# EAGLE board SparkFun_XBee_Regulated_Qwiic-Panel (EAGLE 9.6.2), part 1 of 3
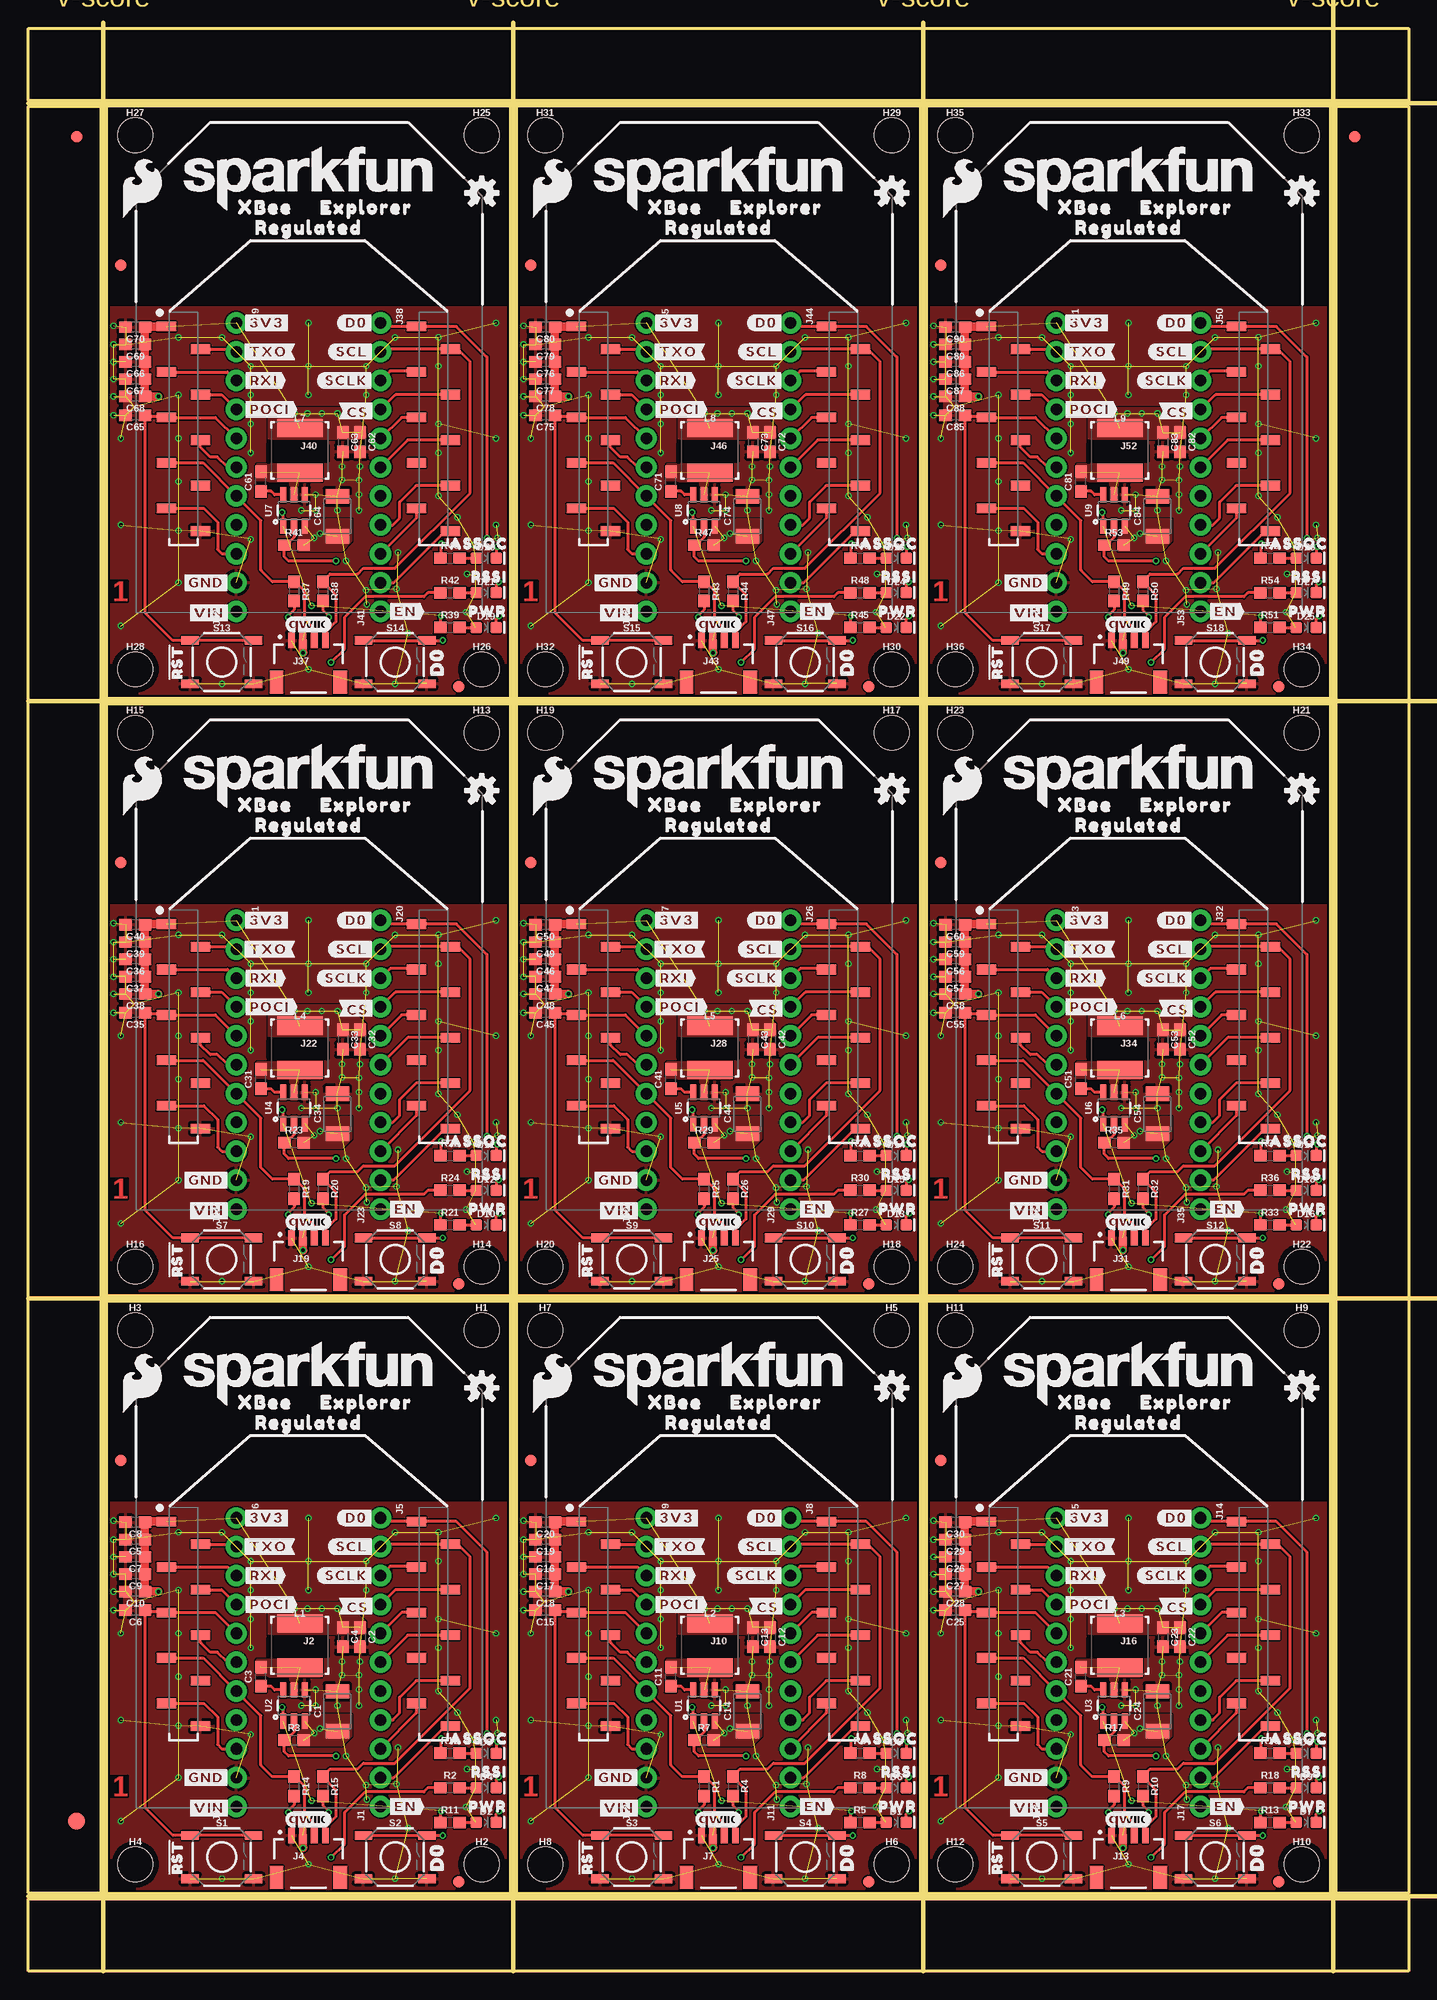
[diagram p0: board, top side]
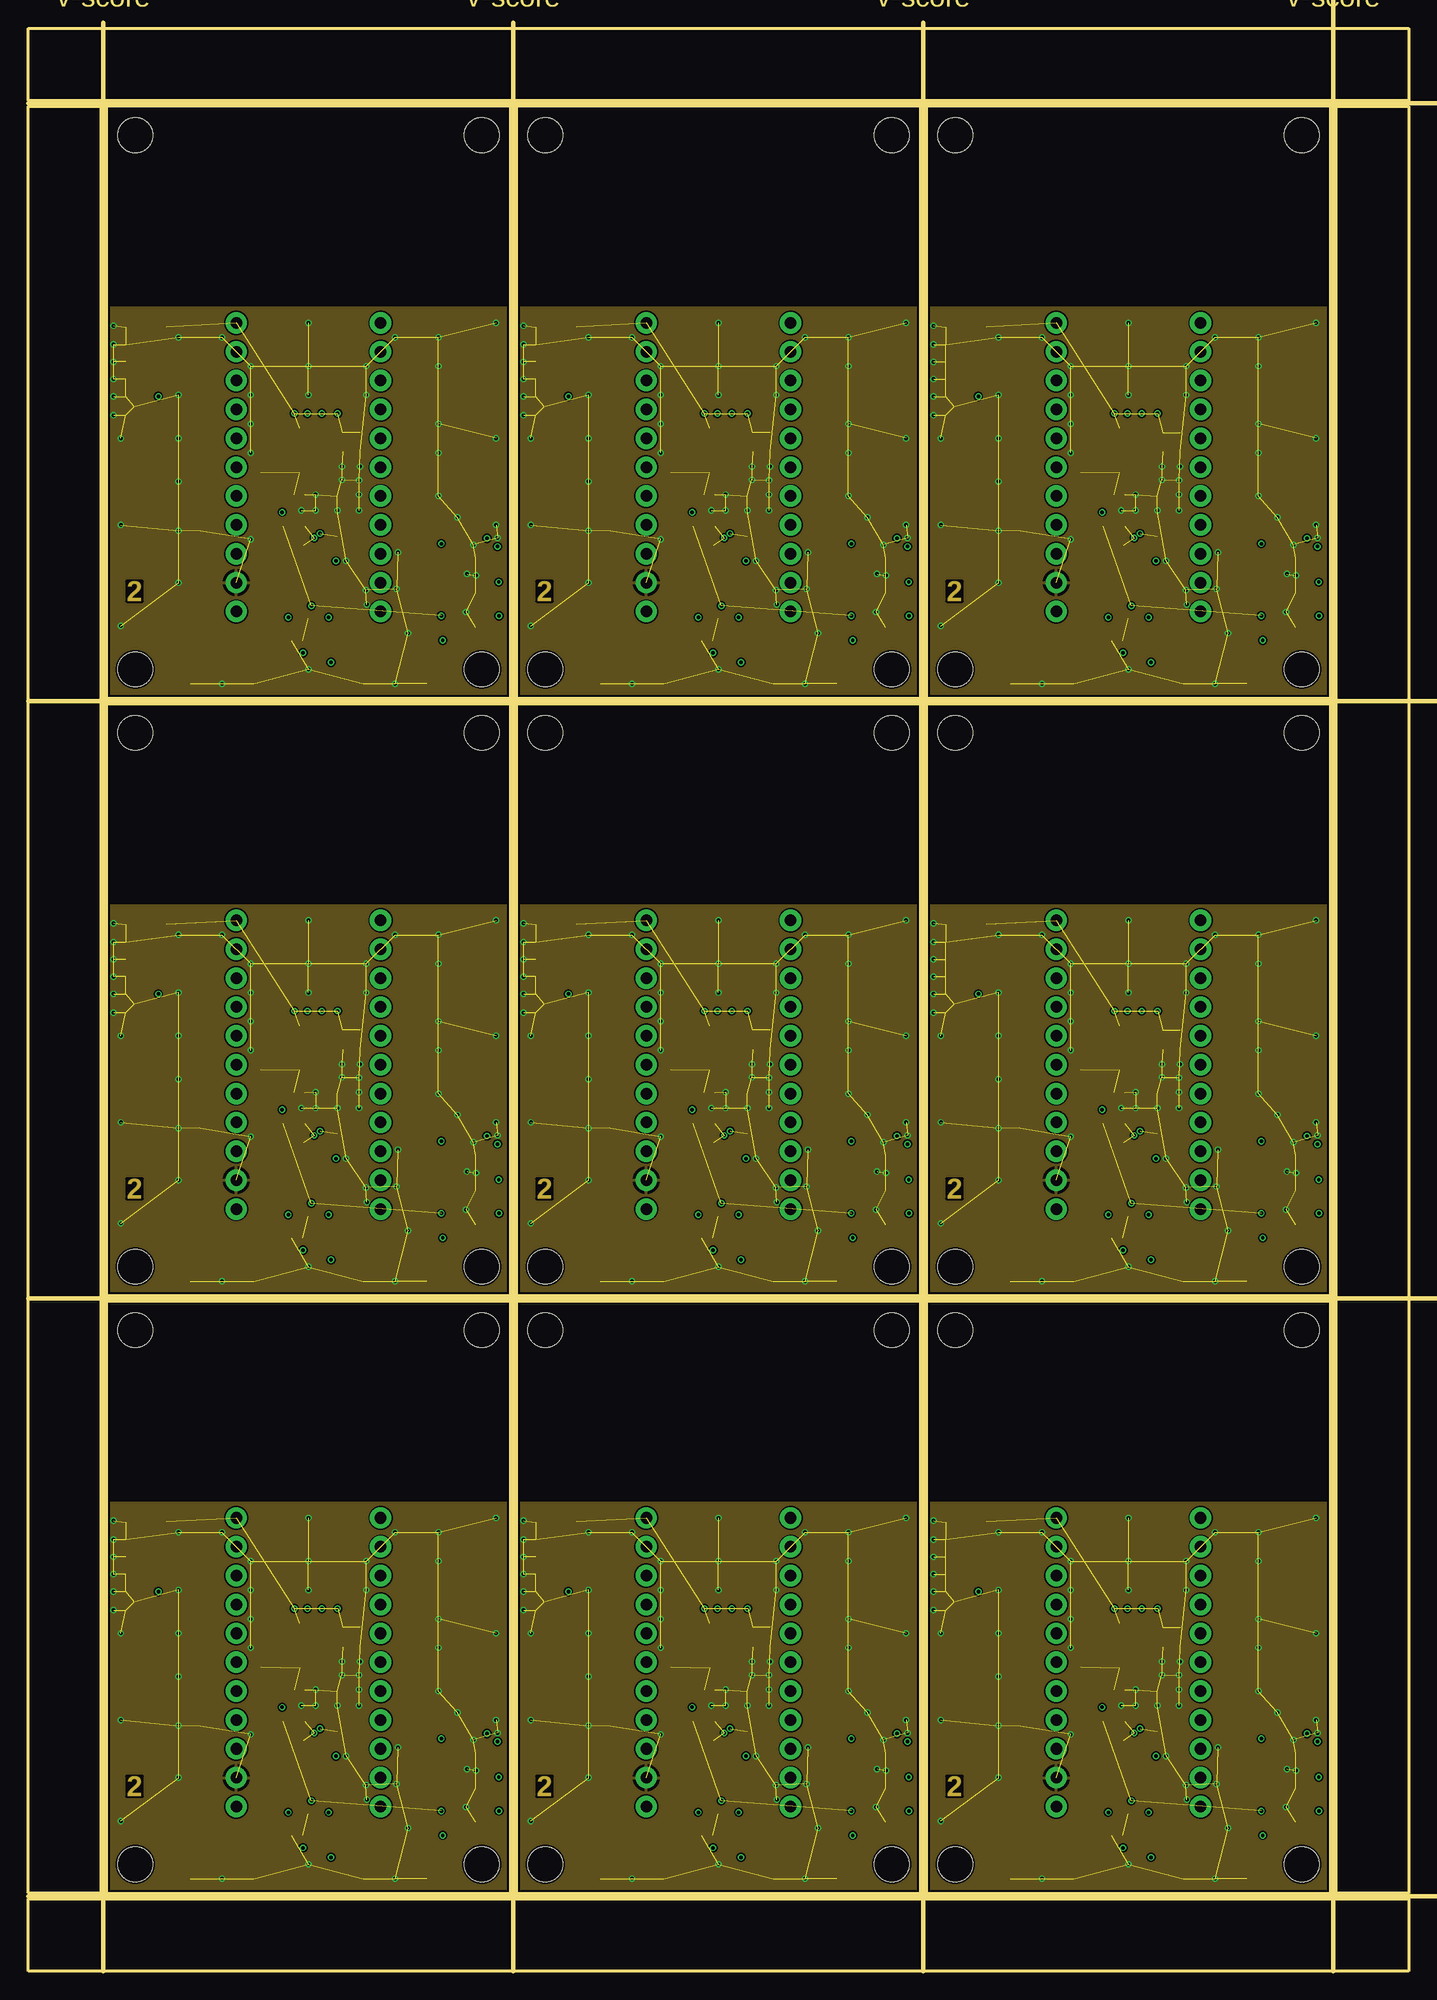
[diagram p1: board, inner layer Route2]
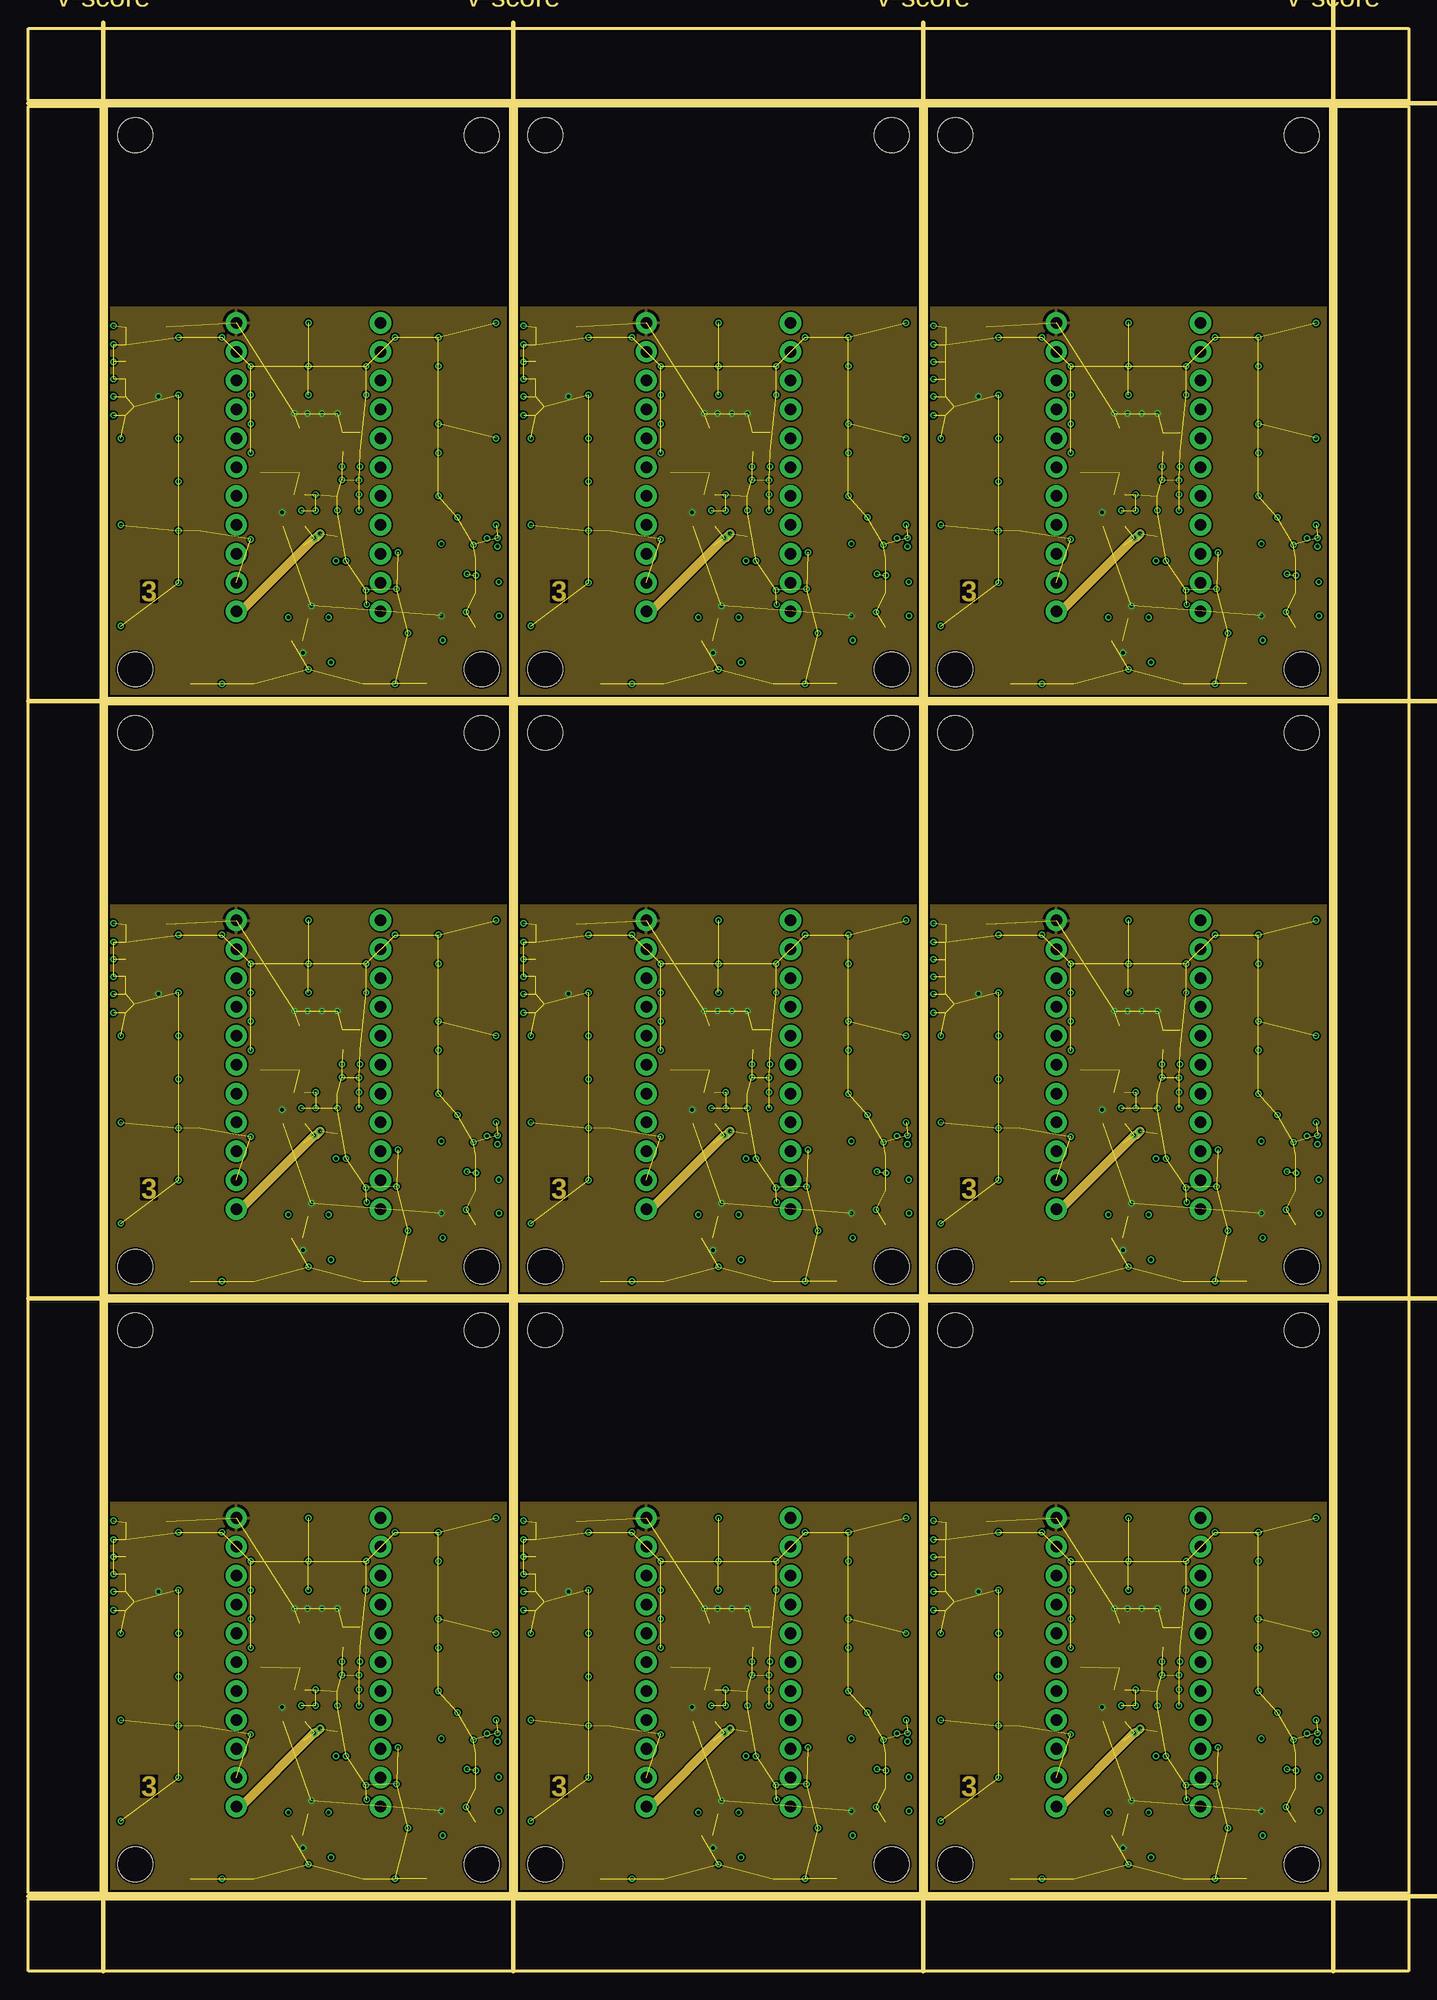
[diagram p2: board, inner layer Route15]
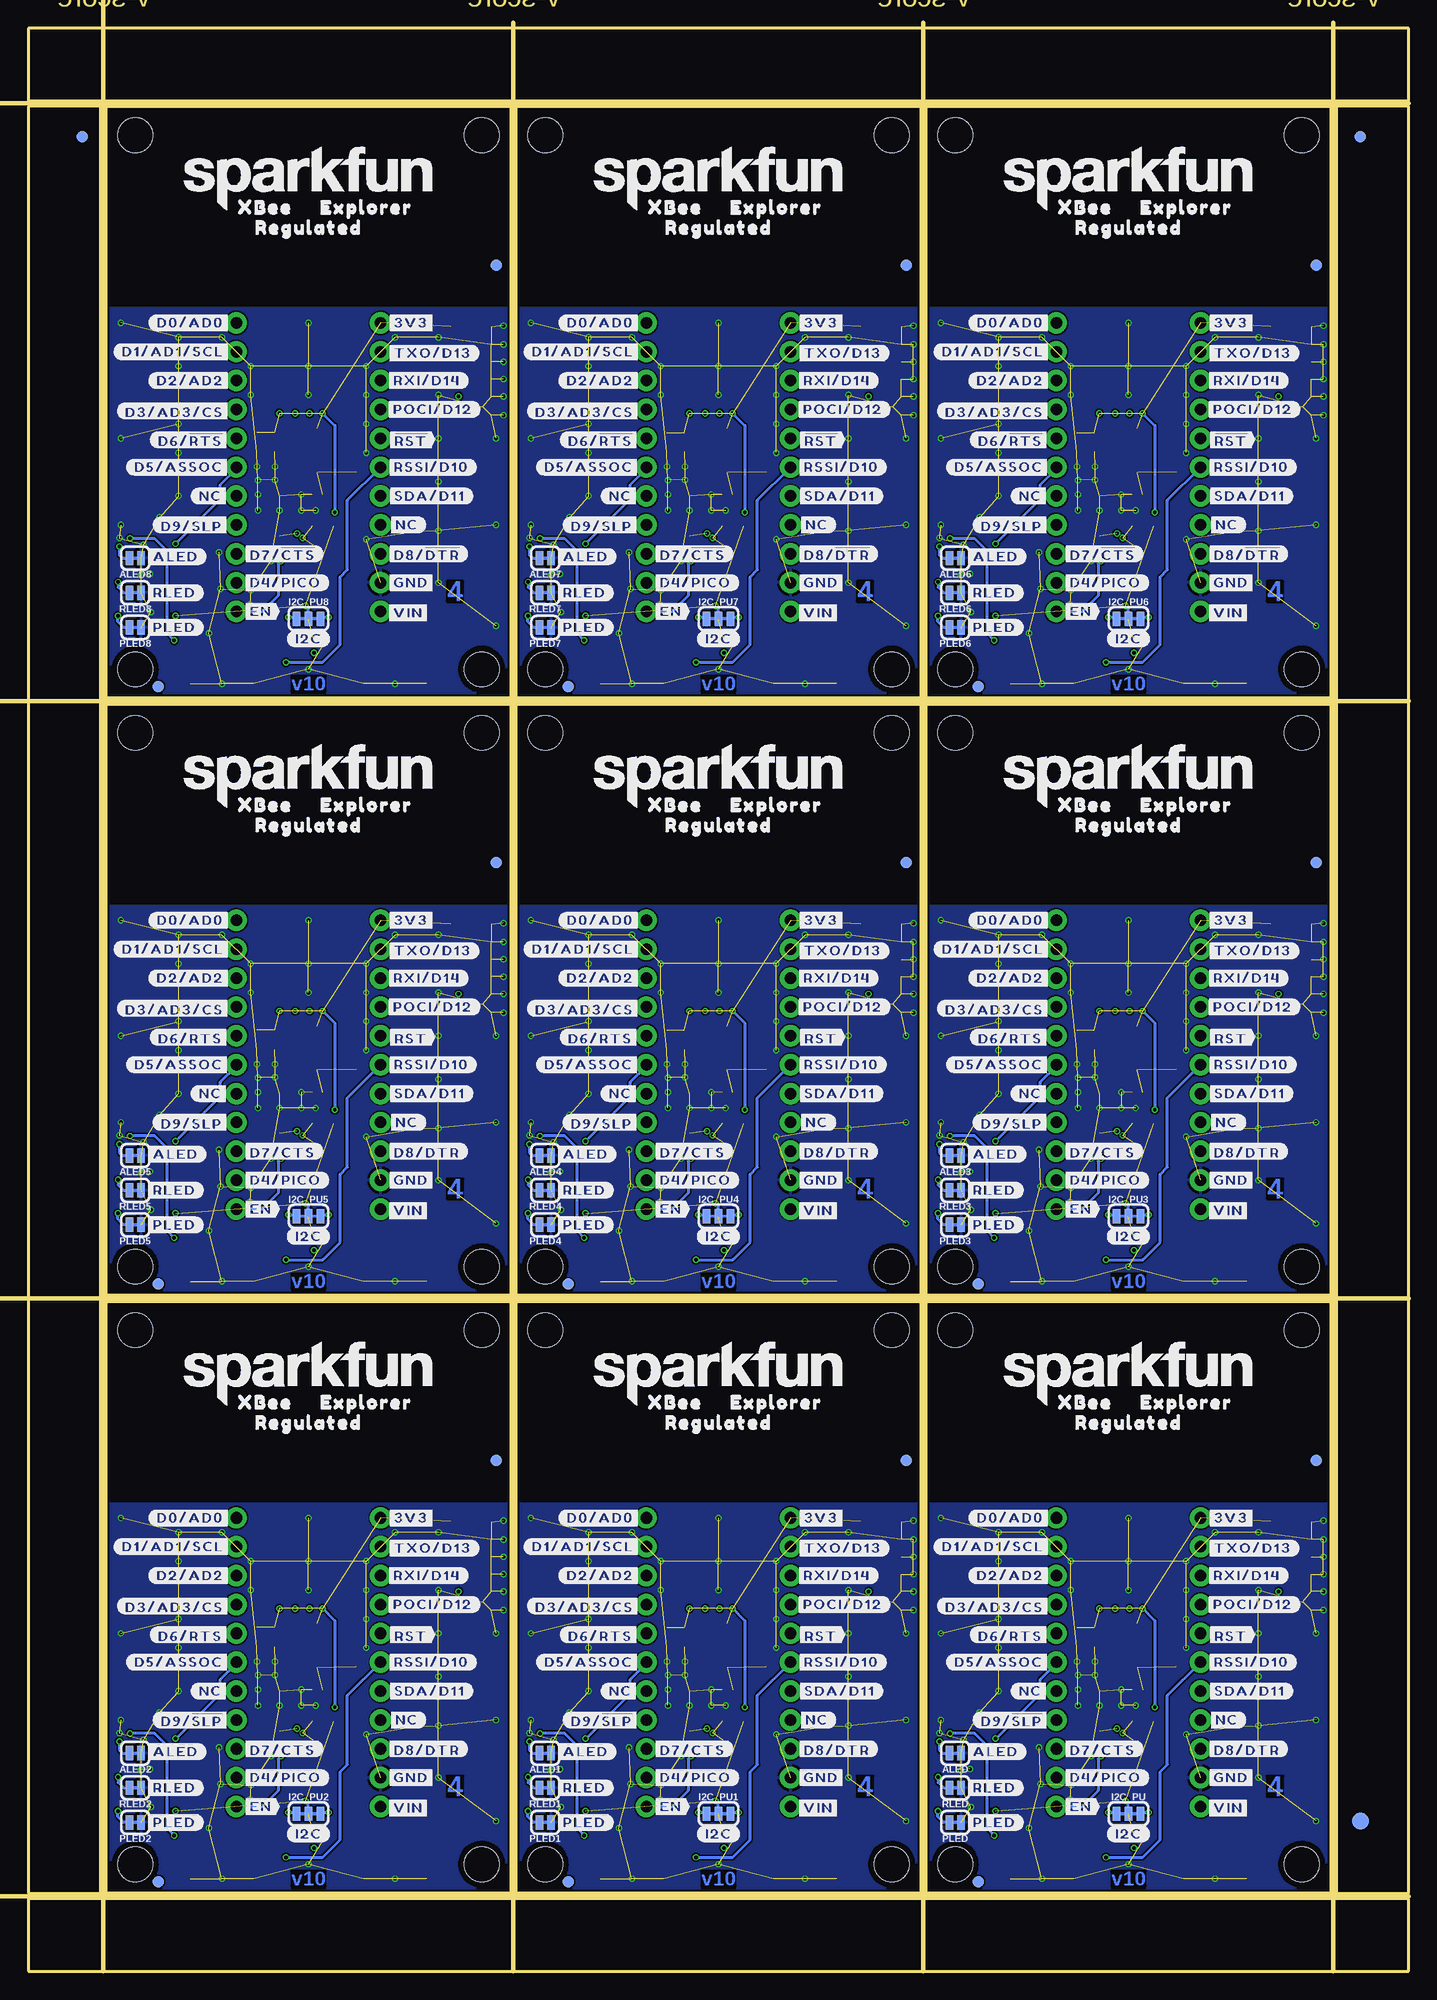
[diagram p3: board, bottom side, seen from below]

Size 121.41 x 170.94 mm. Coordinates in mm from the lower left corner, seen from the top.
Outline: 6.86,58.93 6.86,6.86 42.42,6.86 42.42,58.93 6.86,58.93
Outline: 42.93,58.93 42.93,6.86 78.49,6.86 78.49,58.93 42.93,58.93
Outline: 78.99,58.93 78.99,6.86 114.55,6.86 114.55,58.93 78.99,58.93
Outline: 6.86,111.51 6.86,59.44 42.42,59.44 42.42,111.51 6.86,111.51
Outline: 42.93,111.51 42.93,59.44 78.49,59.44 78.49,111.51 42.93,111.51
Outline: 78.99,111.51 78.99,59.44 114.55,59.44 114.55,111.51 78.99,111.51
Outline: 6.86,164.08 6.86,112.01 42.42,112.01 42.42,164.08 6.86,164.08
Outline: 42.93,164.08 42.93,112.01 78.49,112.01 78.49,164.08 42.93,164.08
Outline: 78.99,164.08 78.99,112.01 114.55,112.01 114.55,164.08 78.99,164.08
Outline: 0,6.35 121.41,6.35 121.41,0 0,0 0,6.35
Outline: 115.06,164.08 121.41,164.08 121.41,6.86 115.06,6.86 115.06,164.08
Outline: 0,170.94 121.41,170.94 121.41,164.59 0,164.59 0,170.94
Outline: 0,164.08 6.35,164.08 6.35,6.86 0,6.86 0,164.08
Copper layers (1*2*15*16): Top 0.035559375mm / dielectric 0.47751875mm / Route2 0.035559375mm / dielectric 0.47751875mm / Route15 0.035559375mm / dielectric 0.47751875mm / Bottom 0.035559375mm
Design rules "SparkFun_XBee_Regulated_Qwiic": minimum track width 5mil, minimum drill 0.2mm, track to track 5mil, track to pad 5mil, pad to pad 5mil, via to via 5mil, smd to smd 5mil, copper to edge 7mil, drill to drill 7mil, minimum pad ring 5mil, minimum via ring 5mil, stop-mask expansion 2.5mil, vias tented up to drill 25mil, thermal gap 10mil
tRestrict: area 21,27.8 to 21.2,29.3; area 26.2,27.7 to 26.4,29.2; area 57.1,27.8 to 57.3,29.3; area 62.3,27.7 to 62.5,29.2; area 93.2,27.8 to 93.3,29.3; area 98.4,27.7 to 98.6,29.2; area 21,80.4 to 21.2,81.9; area 26.2,80.3 to 26.4,81.7; area 57.1,80.4 to 57.3,81.9; area 62.3,80.3 to 62.5,81.7; area 93.2,80.4 to 93.3,81.9; area 98.4,80.3 to 98.6,81.7; area 21,133 to 21.2,134.4; area 26.2,132.8 to 26.4,134.3; area 57.1,133 to 57.3,134.4; area 62.3,132.8 to 62.5,134.3; area 93.2,133 to 93.3,134.4; area 98.4,132.8 to 98.6,134.3
Milling: 8 lines

## Footprints (pad centres in the part's own frame; a part is rotated, then mirrored left to right if it is on the bottom)
SMT-JUMPER_2_NC_TRACE_SILK = smd 0.66 x 1.27: 1 -0.521,0; 2 0.521,0
1210 = smd 1.27 x 2.06: 1 -1.755,0; 2 1.755,0
0603 = smd 1.1 x 1: 1 -0.85,0; 2 0.85,0
LED-0603 = smd 1 x 1: A -0.877,0; C 0.877,0
FIDUCIAL-1X2 = smd 1 x 1: 1 0,0
FIDUCIAL-1.5X3 = smd 1.5 x 1.5: 1 0,0
STAND-OFF-TIGHT = hole 3.048: 0,0
SMT-JUMPER_3_2-NC_TRACE_SILK = smd 0.66 x 1.27: 1 -1.041,0; 2 0,0; 3 1.041,0
1X01_NO_SILK_STAND = drill 1.016 pad 1.88: 1 0,0
XBEE3-SMD = smd 1.7 x 0.85: 1 -12.5,11.11; 2 -9.5,9.11; 3 -12.5,7.11; 4 -9.5,5.11; 5 -12.5,3.11; 6 -9.5,1.11; 7 -12.5,-0.89; 8 -9.5,-2.89; 9 -12.5,-4.89; 10 -9.5,-6.89; 11 12.5,-6.89; 12 9.5,-4.89; 13 12.5,-2.89; 14 9.5,-0.89; 15 12.5,1.11; 16 9.5,3.11; 17 12.5,5.11; 18 9.5,7.11; 19 12.5,9.11; 20 9.5,11.11
JST04_1MM_RA = smd 0.6 x 1.35: 1 -1.5,0; 2 -0.5,0; 3 0.5,0; 4 1.5,0 | smd 1.2 x 2: NC1 2.8,-3.675; NC2 -2.8,-3.675
1X10_NO_SILK = drill 1.016 pad 1.88: 1 0,0; 2 2.54,0; 3 5.08,0; 4 7.62,0; 5 10.16,0; 6 12.7,0; 7 15.24,0; 8 17.78,0; 9 20.32,0; 10 22.86,0
INDUCTOR_3.9UH = smd 4 x 1.6: P$1 0,-2; P$2 0,1.9
TACTILE_SWITCH_SMD_5.2MM = smd 1.524 x 0.762: 1 -2.794,1.905; 2 2.794,1.905; 3 -2.794,-1.905; 4 2.794,-1.905
SOT23-6 = smd 0.55 x 1.35: 1 -0.95,-1.375; 2 0,-1.375; 3 0.95,-1.375; 4 0.95,1.375; 5 0,1.375; 6 -0.95,1.375

## Placement (x,y rotation side)
ALED  JUMPER-SMT_2_NC_TRACE_SILK  [SMT-JUMPER_2_NC_TRACE_SILK]  39.88,19.18 180 bottom
ALED1  JUMPER-SMT_2_NC_TRACE_SILK  [SMT-JUMPER_2_NC_TRACE_SILK]  75.95,19.18 180 bottom
ALED2  JUMPER-SMT_2_NC_TRACE_SILK  [SMT-JUMPER_2_NC_TRACE_SILK]  112.01,19.18 180 bottom
ALED3  JUMPER-SMT_2_NC_TRACE_SILK  [SMT-JUMPER_2_NC_TRACE_SILK]  39.88,71.76 180 bottom
ALED4  JUMPER-SMT_2_NC_TRACE_SILK  [SMT-JUMPER_2_NC_TRACE_SILK]  75.95,71.76 180 bottom
ALED5  JUMPER-SMT_2_NC_TRACE_SILK  [SMT-JUMPER_2_NC_TRACE_SILK]  112.01,71.76 180 bottom
ALED6  JUMPER-SMT_2_NC_TRACE_SILK  [SMT-JUMPER_2_NC_TRACE_SILK]  39.88,124.33 180 bottom
ALED7  JUMPER-SMT_2_NC_TRACE_SILK  [SMT-JUMPER_2_NC_TRACE_SILK]  75.95,124.33 180 bottom
ALED8  JUMPER-SMT_2_NC_TRACE_SILK  [SMT-JUMPER_2_NC_TRACE_SILK]  112.01,124.33 180 bottom
C1  10uF  [1210]  27.18,22.86 90 top
C2  22uF  [0603]  29.18,29.39 270 top
C3  0.1uF  [0603]  20.45,25.91 90 top
C4  22uF  [0603]  27.66,29.39 270 top
C5  47pF  [0603]  9.4,37.97 180 top
C6  10nF  [0603]  9.4,31.75 180 top
C7  10nF  [0603]  9.4,36.45 180 top
C8  10pF  [0603]  9.4,39.5 180 top
C9  0.1uF  [0603]  9.4,34.92 180 top
C10  10uF  [0603]  9.4,33.4 180 top
C11  0.1uF  [0603]  56.51,25.91 90 top
C12  22uF  [0603]  65.25,29.39 270 top
C13  22uF  [0603]  63.73,29.39 270 top
C14  10uF  [1210]  63.25,22.86 90 top
C15  10nF  [0603]  45.47,31.75 180 top
C16  10nF  [0603]  45.47,36.45 180 top
C17  0.1uF  [0603]  45.47,34.92 180 top
C18  10uF  [0603]  45.47,33.4 180 top
C19  47pF  [0603]  45.47,37.97 180 top
C20  10pF  [0603]  45.47,39.5 180 top
C21  0.1uF  [0603]  92.58,25.91 90 top
C22  22uF  [0603]  101.32,29.39 270 top
C23  22uF  [0603]  99.8,29.39 270 top
C24  10uF  [1210]  99.31,22.86 90 top
C25  10nF  [0603]  81.53,31.75 180 top
C26  10nF  [0603]  81.53,36.45 180 top
C27  0.1uF  [0603]  81.53,34.92 180 top
C28  10uF  [0603]  81.53,33.4 180 top
C29  47pF  [0603]  81.53,37.97 180 top
C30  10pF  [0603]  81.53,39.5 180 top
C31  0.1uF  [0603]  20.45,78.49 90 top
C32  22uF  [0603]  29.18,81.97 270 top
C33  22uF  [0603]  27.66,81.97 270 top
C34  10uF  [1210]  27.18,75.44 90 top
C35  10nF  [0603]  9.4,84.33 180 top
C36  10nF  [0603]  9.4,89.03 180 top
C37  0.1uF  [0603]  9.4,87.5 180 top
C38  10uF  [0603]  9.4,85.98 180 top
C39  47pF  [0603]  9.4,90.55 180 top
C40  10pF  [0603]  9.4,92.08 180 top
C41  0.1uF  [0603]  56.51,78.49 90 top
C42  22uF  [0603]  65.25,81.97 270 top
C43  22uF  [0603]  63.73,81.97 270 top
C44  10uF  [1210]  63.25,75.44 90 top
C45  10nF  [0603]  45.47,84.33 180 top
C46  10nF  [0603]  45.47,89.03 180 top
C47  0.1uF  [0603]  45.47,87.5 180 top
C48  10uF  [0603]  45.47,85.98 180 top
C49  47pF  [0603]  45.47,90.55 180 top
C50  10pF  [0603]  45.47,92.08 180 top
C51  0.1uF  [0603]  92.58,78.49 90 top
C52  22uF  [0603]  101.32,81.97 270 top
C53  22uF  [0603]  99.8,81.97 270 top
C54  10uF  [1210]  99.31,75.44 90 top
C55  10nF  [0603]  81.53,84.33 180 top
C56  10nF  [0603]  81.53,89.03 180 top
C57  0.1uF  [0603]  81.53,87.5 180 top
C58  10uF  [0603]  81.53,85.98 180 top
C59  47pF  [0603]  81.53,90.55 180 top
C60  10pF  [0603]  81.53,92.08 180 top
C61  0.1uF  [0603]  20.45,131.06 90 top
C62  22uF  [0603]  29.18,134.54 270 top
C63  22uF  [0603]  27.66,134.54 270 top
C64  10uF  [1210]  27.18,128.02 90 top
C65  10nF  [0603]  9.4,136.91 180 top
C66  10nF  [0603]  9.4,141.61 180 top
C67  0.1uF  [0603]  9.4,140.08 180 top
C68  10uF  [0603]  9.4,138.56 180 top
C69  47pF  [0603]  9.4,143.13 180 top
C70  10pF  [0603]  9.4,144.65 180 top
C71  0.1uF  [0603]  56.51,131.06 90 top
C72  22uF  [0603]  65.25,134.54 270 top
C73  22uF  [0603]  63.73,134.54 270 top
C74  10uF  [1210]  63.25,128.02 90 top
C75  10nF  [0603]  45.47,136.91 180 top
C76  10nF  [0603]  45.47,141.61 180 top
C77  0.1uF  [0603]  45.47,140.08 180 top
C78  10uF  [0603]  45.47,138.56 180 top
C79  47pF  [0603]  45.47,143.13 180 top
C80  10pF  [0603]  45.47,144.65 180 top
C81  0.1uF  [0603]  92.58,131.06 90 top
C82  22uF  [0603]  101.32,134.54 270 top
C83  22uF  [0603]  99.8,134.54 270 top
C84  10uF  [1210]  99.31,128.02 90 top
C85  10nF  [0603]  81.53,136.91 180 top
C86  10nF  [0603]  81.53,141.61 180 top
C87  0.1uF  [0603]  81.53,140.08 180 top
C88  10uF  [0603]  81.53,138.56 180 top
C89  47pF  [0603]  81.53,143.13 180 top
C90  10pF  [0603]  81.53,144.65 180 top
D1  RED  [LED-0603]  76.33,13.08 0 top
D2  RED  [LED-0603]  40.26,13.08 0 top
D3  BLUE  [LED-0603]  40.26,19.18 0 top
D4  Yellow  [LED-0603]  40.26,16.13 0 top
D5  BLUE  [LED-0603]  76.33,19.18 0 top
D6  Yellow  [LED-0603]  76.33,16.13 0 top
D7  RED  [LED-0603]  112.4,13.08 0 top
D8  BLUE  [LED-0603]  112.4,19.18 0 top
D9  Yellow  [LED-0603]  112.4,16.13 0 top
D10  RED  [LED-0603]  40.26,65.66 0 top
D11  BLUE  [LED-0603]  40.26,71.76 0 top
D12  Yellow  [LED-0603]  40.26,68.71 0 top
D13  RED  [LED-0603]  76.33,65.66 0 top
D14  BLUE  [LED-0603]  76.33,71.76 0 top
D15  Yellow  [LED-0603]  76.33,68.71 0 top
D16  RED  [LED-0603]  112.4,65.66 0 top
D17  BLUE  [LED-0603]  112.4,71.76 0 top
D18  Yellow  [LED-0603]  112.4,68.71 0 top
D19  RED  [LED-0603]  40.26,118.24 0 top
D20  BLUE  [LED-0603]  40.26,124.33 0 top
D21  Yellow  [LED-0603]  40.26,121.29 0 top
D22  RED  [LED-0603]  76.33,118.24 0 top
D23  BLUE  [LED-0603]  76.33,124.33 0 top
D24  Yellow  [LED-0603]  76.33,121.29 0 top
D25  RED  [LED-0603]  112.4,118.24 0 top
D26  BLUE  [LED-0603]  112.4,124.33 0 top
D27  Yellow  [LED-0603]  112.4,121.29 0 top
E$1  [FIDUCIAL-1X2]  4.23,161.42 0 top
E$2  [FIDUCIAL-1X2]  4.23,161.42 0 bottom
E$3  [FIDUCIAL-1X2]  116.67,161.42 0 top
E$4  [FIDUCIAL-1X2]  116.67,161.42 0 bottom
E$5  [FIDUCIAL-1.5X3]  4.23,13.21 0 top
E$6  [FIDUCIAL-1.5X3]  4.23,13.21 0 bottom
FD1  FIDUCIAL1X2  [FIDUCIAL-1X2]  8.13,44.96 0 top
FD2  FIDUCIAL1X2  [FIDUCIAL-1X2]  8.13,44.96 0 bottom
FD3  FIDUCIAL1X2  [FIDUCIAL-1X2]  37.85,7.87 0 top
FD4  FIDUCIAL1X2  [FIDUCIAL-1X2]  37.85,7.87 0 bottom
FD5  FIDUCIAL1X2  [FIDUCIAL-1X2]  44.2,44.96 0 top
FD6  FIDUCIAL1X2  [FIDUCIAL-1X2]  44.2,44.96 0 bottom
FD7  FIDUCIAL1X2  [FIDUCIAL-1X2]  73.91,7.87 0 top
FD8  FIDUCIAL1X2  [FIDUCIAL-1X2]  73.91,7.87 0 bottom
FD9  FIDUCIAL1X2  [FIDUCIAL-1X2]  80.26,44.96 0 top
FD10  FIDUCIAL1X2  [FIDUCIAL-1X2]  80.26,44.96 0 bottom
FD11  FIDUCIAL1X2  [FIDUCIAL-1X2]  109.98,7.87 0 top
FD12  FIDUCIAL1X2  [FIDUCIAL-1X2]  109.98,7.87 0 bottom
FD13  FIDUCIAL1X2  [FIDUCIAL-1X2]  8.13,97.54 0 top
FD14  FIDUCIAL1X2  [FIDUCIAL-1X2]  8.13,97.54 0 bottom
FD15  FIDUCIAL1X2  [FIDUCIAL-1X2]  37.85,60.45 0 top
FD16  FIDUCIAL1X2  [FIDUCIAL-1X2]  37.85,60.45 0 bottom
FD17  FIDUCIAL1X2  [FIDUCIAL-1X2]  44.2,97.54 0 top
FD18  FIDUCIAL1X2  [FIDUCIAL-1X2]  44.2,97.54 0 bottom
FD19  FIDUCIAL1X2  [FIDUCIAL-1X2]  73.91,60.45 0 top
FD20  FIDUCIAL1X2  [FIDUCIAL-1X2]  73.91,60.45 0 bottom
FD21  FIDUCIAL1X2  [FIDUCIAL-1X2]  80.26,97.54 0 top
FD22  FIDUCIAL1X2  [FIDUCIAL-1X2]  80.26,97.54 0 bottom
FD23  FIDUCIAL1X2  [FIDUCIAL-1X2]  109.98,60.45 0 top
FD24  FIDUCIAL1X2  [FIDUCIAL-1X2]  109.98,60.45 0 bottom
FD25  FIDUCIAL1X2  [FIDUCIAL-1X2]  8.13,150.11 0 top
FD26  FIDUCIAL1X2  [FIDUCIAL-1X2]  8.13,150.11 0 bottom
FD27  FIDUCIAL1X2  [FIDUCIAL-1X2]  37.85,113.03 0 top
FD28  FIDUCIAL1X2  [FIDUCIAL-1X2]  37.85,113.03 0 bottom
FD29  FIDUCIAL1X2  [FIDUCIAL-1X2]  44.2,150.11 0 top
FD30  FIDUCIAL1X2  [FIDUCIAL-1X2]  44.2,150.11 0 bottom
FD31  FIDUCIAL1X2  [FIDUCIAL-1X2]  73.91,113.03 0 top
FD32  FIDUCIAL1X2  [FIDUCIAL-1X2]  73.91,113.03 0 bottom
FD33  FIDUCIAL1X2  [FIDUCIAL-1X2]  80.26,150.11 0 top
FD34  FIDUCIAL1X2  [FIDUCIAL-1X2]  80.26,150.11 0 bottom
FD35  FIDUCIAL1X2  [FIDUCIAL-1X2]  109.98,113.03 0 top
FD36  FIDUCIAL1X2  [FIDUCIAL-1X2]  109.98,113.03 0 bottom
FRAME1  FRAME-LETTER  [CREATIVE_COMMONS]  34.04,-21.08 0 top  (outside the outline)
FRAME2  FRAME-LETTER  [CREATIVE_COMMONS]  -2.03,-21.08 0 top  (outside the outline)
FRAME3  FRAME-LETTER  [CREATIVE_COMMONS]  70.1,-21.08 0 top  (outside the outline)
FRAME4  FRAME-LETTER  [CREATIVE_COMMONS]  -2.03,31.5 0 top
FRAME5  FRAME-LETTER  [CREATIVE_COMMONS]  34.04,31.5 0 top
FRAME6  FRAME-LETTER  [CREATIVE_COMMONS]  70.1,31.5 0 top
FRAME7  FRAME-LETTER  [CREATIVE_COMMONS]  -2.03,84.07 0 top
FRAME8  FRAME-LETTER  [CREATIVE_COMMONS]  34.04,84.07 0 top
FRAME9  FRAME-LETTER  [CREATIVE_COMMONS]  70.1,84.07 0 top
H1  STAND-OFFTIGHT  [STAND-OFF-TIGHT]  39.88,56.39 0 top
H2  STAND-OFFTIGHT  [STAND-OFF-TIGHT]  39.88,9.4 0 top
H3  STAND-OFFTIGHT  [STAND-OFF-TIGHT]  9.4,56.39 0 top
H4  STAND-OFFTIGHT  [STAND-OFF-TIGHT]  9.4,9.4 0 top
H5  STAND-OFFTIGHT  [STAND-OFF-TIGHT]  75.95,56.39 0 top
H6  STAND-OFFTIGHT  [STAND-OFF-TIGHT]  75.95,9.4 0 top
H7  STAND-OFFTIGHT  [STAND-OFF-TIGHT]  45.47,56.39 0 top
H8  STAND-OFFTIGHT  [STAND-OFF-TIGHT]  45.47,9.4 0 top
H9  STAND-OFFTIGHT  [STAND-OFF-TIGHT]  112.01,56.39 0 top
H10  STAND-OFFTIGHT  [STAND-OFF-TIGHT]  112.01,9.4 0 top
H11  STAND-OFFTIGHT  [STAND-OFF-TIGHT]  81.53,56.39 0 top
H12  STAND-OFFTIGHT  [STAND-OFF-TIGHT]  81.53,9.4 0 top
H13  STAND-OFFTIGHT  [STAND-OFF-TIGHT]  39.88,108.97 0 top
H14  STAND-OFFTIGHT  [STAND-OFF-TIGHT]  39.88,61.98 0 top
H15  STAND-OFFTIGHT  [STAND-OFF-TIGHT]  9.4,108.97 0 top
H16  STAND-OFFTIGHT  [STAND-OFF-TIGHT]  9.4,61.98 0 top
H17  STAND-OFFTIGHT  [STAND-OFF-TIGHT]  75.95,108.97 0 top
H18  STAND-OFFTIGHT  [STAND-OFF-TIGHT]  75.95,61.98 0 top
H19  STAND-OFFTIGHT  [STAND-OFF-TIGHT]  45.47,108.97 0 top
H20  STAND-OFFTIGHT  [STAND-OFF-TIGHT]  45.47,61.98 0 top
H21  STAND-OFFTIGHT  [STAND-OFF-TIGHT]  112.01,108.97 0 top
H22  STAND-OFFTIGHT  [STAND-OFF-TIGHT]  112.01,61.98 0 top
H23  STAND-OFFTIGHT  [STAND-OFF-TIGHT]  81.53,108.97 0 top
H24  STAND-OFFTIGHT  [STAND-OFF-TIGHT]  81.53,61.98 0 top
H25  STAND-OFFTIGHT  [STAND-OFF-TIGHT]  39.88,161.54 0 top
H26  STAND-OFFTIGHT  [STAND-OFF-TIGHT]  39.88,114.55 0 top
H27  STAND-OFFTIGHT  [STAND-OFF-TIGHT]  9.4,161.54 0 top
H28  STAND-OFFTIGHT  [STAND-OFF-TIGHT]  9.4,114.55 0 top
H29  STAND-OFFTIGHT  [STAND-OFF-TIGHT]  75.95,161.54 0 top
H30  STAND-OFFTIGHT  [STAND-OFF-TIGHT]  75.95,114.55 0 top
H31  STAND-OFFTIGHT  [STAND-OFF-TIGHT]  45.47,161.54 0 top
H32  STAND-OFFTIGHT  [STAND-OFF-TIGHT]  45.47,114.55 0 top
H33  STAND-OFFTIGHT  [STAND-OFF-TIGHT]  112.01,161.54 0 top
H34  STAND-OFFTIGHT  [STAND-OFF-TIGHT]  112.01,114.55 0 top
H35  STAND-OFFTIGHT  [STAND-OFF-TIGHT]  81.53,161.54 0 top
H36  STAND-OFFTIGHT  [STAND-OFF-TIGHT]  81.53,114.55 0 top
I2C_PU  JUMPER-SMT_3_2-NC_TRACE_SILK  [SMT-JUMPER_3_2-NC_TRACE_SILK]  24.64,13.84 0 bottom
I2C_PU1  JUMPER-SMT_3_2-NC_TRACE_SILK  [SMT-JUMPER_3_2-NC_TRACE_SILK]  60.71,13.84 0 bottom
I2C_PU2  JUMPER-SMT_3_2-NC_TRACE_SILK  [SMT-JUMPER_3_2-NC_TRACE_SILK]  96.77,13.84 0 bottom
I2C_PU3  JUMPER-SMT_3_2-NC_TRACE_SILK  [SMT-JUMPER_3_2-NC_TRACE_SILK]  24.64,66.42 0 bottom
I2C_PU4  JUMPER-SMT_3_2-NC_TRACE_SILK  [SMT-JUMPER_3_2-NC_TRACE_SILK]  60.71,66.42 0 bottom
I2C_PU5  JUMPER-SMT_3_2-NC_TRACE_SILK  [SMT-JUMPER_3_2-NC_TRACE_SILK]  96.77,66.42 0 bottom
I2C_PU6  JUMPER-SMT_3_2-NC_TRACE_SILK  [SMT-JUMPER_3_2-NC_TRACE_SILK]  24.64,119 0 bottom
I2C_PU7  JUMPER-SMT_3_2-NC_TRACE_SILK  [SMT-JUMPER_3_2-NC_TRACE_SILK]  60.71,119 0 bottom
I2C_PU8  JUMPER-SMT_3_2-NC_TRACE_SILK  [SMT-JUMPER_3_2-NC_TRACE_SILK]  96.77,119 0 bottom
J1  [1X01_NO_SILK_STAND]  30.99,14.48 90 top
J2  [XBEE3-SMD]  24.64,28.45 0 top
J3  [1X01_NO_SILK_STAND]  18.29,14.48 90 top
J4  QWIIC_RIGHT_ANGLE  [JST04_1MM_RA]  24.64,11.94 0 top
J5  [1X10_NO_SILK]  30.99,39.88 270 top
J6  [1X10_NO_SILK]  18.29,39.88 270 top
J7  QWIIC_RIGHT_ANGLE  [JST04_1MM_RA]  60.71,11.94 0 top
J8  [1X10_NO_SILK]  67.06,39.88 270 top
J9  [1X10_NO_SILK]  54.36,39.88 270 top
J10  [XBEE3-SMD]  60.71,28.45 0 top
J11  [1X01_NO_SILK_STAND]  67.06,14.48 90 top
J12  [1X01_NO_SILK_STAND]  54.36,14.48 90 top
J13  QWIIC_RIGHT_ANGLE  [JST04_1MM_RA]  96.77,11.94 0 top
J14  [1X10_NO_SILK]  103.12,39.88 270 top
J15  [1X10_NO_SILK]  90.42,39.88 270 top
J16  [XBEE3-SMD]  96.77,28.45 0 top
J17  [1X01_NO_SILK_STAND]  103.12,14.48 90 top
J18  [1X01_NO_SILK_STAND]  90.42,14.48 90 top
J19  QWIIC_RIGHT_ANGLE  [JST04_1MM_RA]  24.64,64.52 0 top
J20  [1X10_NO_SILK]  30.99,92.46 270 top
J21  [1X10_NO_SILK]  18.29,92.46 270 top
J22  [XBEE3-SMD]  24.64,81.03 0 top
J23  [1X01_NO_SILK_STAND]  30.99,67.06 90 top
J24  [1X01_NO_SILK_STAND]  18.29,67.06 90 top
J25  QWIIC_RIGHT_ANGLE  [JST04_1MM_RA]  60.71,64.52 0 top
J26  [1X10_NO_SILK]  67.06,92.46 270 top
J27  [1X10_NO_SILK]  54.36,92.46 270 top
J28  [XBEE3-SMD]  60.71,81.03 0 top
J29  [1X01_NO_SILK_STAND]  67.06,67.06 90 top
J30  [1X01_NO_SILK_STAND]  54.36,67.06 90 top
J31  QWIIC_RIGHT_ANGLE  [JST04_1MM_RA]  96.77,64.52 0 top
J32  [1X10_NO_SILK]  103.12,92.46 270 top
J33  [1X10_NO_SILK]  90.42,92.46 270 top
J34  [XBEE3-SMD]  96.77,81.03 0 top
J35  [1X01_NO_SILK_STAND]  103.12,67.06 90 top
J36  [1X01_NO_SILK_STAND]  90.42,67.06 90 top
J37  QWIIC_RIGHT_ANGLE  [JST04_1MM_RA]  24.64,117.09 0 top
J38  [1X10_NO_SILK]  30.99,145.03 270 top
J39  [1X10_NO_SILK]  18.29,145.03 270 top
J40  [XBEE3-SMD]  24.64,133.6 0 top
J41  [1X01_NO_SILK_STAND]  30.99,119.63 90 top
J42  [1X01_NO_SILK_STAND]  18.29,119.63 90 top
J43  QWIIC_RIGHT_ANGLE  [JST04_1MM_RA]  60.71,117.09 0 top
J44  [1X10_NO_SILK]  67.06,145.03 270 top
J45  [1X10_NO_SILK]  54.36,145.03 270 top
J46  [XBEE3-SMD]  60.71,133.6 0 top
J47  [1X01_NO_SILK_STAND]  67.06,119.63 90 top
J48  [1X01_NO_SILK_STAND]  54.36,119.63 90 top
J49  QWIIC_RIGHT_ANGLE  [JST04_1MM_RA]  96.77,117.09 0 top
J50  [1X10_NO_SILK]  103.12,145.03 270 top
J51  [1X10_NO_SILK]  90.42,145.03 270 top
J52  [XBEE3-SMD]  96.77,133.6 0 top
J53  [1X01_NO_SILK_STAND]  103.12,119.63 90 top
J54  [1X01_NO_SILK_STAND]  90.42,119.63 90 top
L1  3.9UH  [INDUCTOR_3.9UH]  23.88,28.7 0 top
L2  3.9UH  [INDUCTOR_3.9UH]  59.94,28.7 0 top
L3  3.9UH  [INDUCTOR_3.9UH]  96.01,28.7 0 top
L4  3.9UH  [INDUCTOR_3.9UH]  23.88,81.28 0 top
L5  3.9UH  [INDUCTOR_3.9UH]  59.94,81.28 0 top
L6  3.9UH  [INDUCTOR_3.9UH]  96.01,81.28 0 top
L7  3.9UH  [INDUCTOR_3.9UH]  23.88,133.86 0 top
L8  3.9UH  [INDUCTOR_3.9UH]  59.94,133.86 0 top
L9  3.9UH  [INDUCTOR_3.9UH]  96.01,133.86 0 top
LOGO1  OSHW-LOGOS  [OSHW-LOGO-S]  75.95,51.31 0 top
LOGO2  OSHW-LOGOS  [OSHW-LOGO-S]  39.88,51.31 0 top
LOGO3  QWIIC_LOGO_4MM  [QWIIC_4MM]  24.64,13.34 0 top
LOGO4  SFE_LOGO_NAMEBLANK  [BLANK]  -2.03,-21.08 0 top  (outside the outline)
LOGO5  QWIIC_LOGO_4MM  [QWIIC_4MM]  60.71,13.34 0 top
LOGO6  SFE_LOGO_NAMEBLANK  [BLANK]  34.04,-21.08 0 top  (outside the outline)
LOGO7  OSHW-LOGOS  [OSHW-LOGO-S]  112.01,51.31 0 top
LOGO8  QWIIC_LOGO_4MM  [QWIIC_4MM]  96.77,13.34 0 top
LOGO9  SFE_LOGO_NAMEBLANK  [BLANK]  70.1,-21.08 0 top  (outside the outline)
LOGO10  OSHW-LOGOS  [OSHW-LOGO-S]  39.88,103.89 0 top
LOGO11  QWIIC_LOGO_4MM  [QWIIC_4MM]  24.64,65.91 0 top
LOGO12  SFE_LOGO_NAMEBLANK  [BLANK]  -2.03,31.5 0 top
LOGO13  OSHW-LOGOS  [OSHW-LOGO-S]  75.95,103.89 0 top
LOGO14  QWIIC_LOGO_4MM  [QWIIC_4MM]  60.71,65.91 0 top
LOGO15  SFE_LOGO_NAMEBLANK  [BLANK]  34.04,31.5 0 top
LOGO16  OSHW-LOGOS  [OSHW-LOGO-S]  112.01,103.89 0 top
LOGO17  QWIIC_LOGO_4MM  [QWIIC_4MM]  96.77,65.91 0 top
LOGO18  SFE_LOGO_NAMEBLANK  [BLANK]  70.1,31.5 0 top
LOGO19  OSHW-LOGOS  [OSHW-LOGO-S]  39.88,156.46 0 top
LOGO20  QWIIC_LOGO_4MM  [QWIIC_4MM]  24.64,118.49 0 top
LOGO21  SFE_LOGO_NAMEBLANK  [BLANK]  -2.03,84.07 0 top
LOGO22  OSHW-LOGOS  [OSHW-LOGO-S]  75.95,156.46 0 top
LOGO23  QWIIC_LOGO_4MM  [QWIIC_4MM]  60.71,118.49 0 top
LOGO24  SFE_LOGO_NAMEBLANK  [BLANK]  34.04,84.07 0 top
LOGO25  OSHW-LOGOS  [OSHW-LOGO-S]  112.01,156.46 0 top
LOGO26  QWIIC_LOGO_4MM  [QWIIC_4MM]  96.77,118.49 0 top
LOGO27  SFE_LOGO_NAMEBLANK  [BLANK]  70.1,84.07 0 top
PLED  JUMPER-SMT_2_NC_TRACE_SILK  [SMT-JUMPER_2_NC_TRACE_SILK]  39.88,13.08 180 bottom
PLED1  JUMPER-SMT_2_NC_TRACE_SILK  [SMT-JUMPER_2_NC_TRACE_SILK]  75.95,13.08 180 bottom
PLED2  JUMPER-SMT_2_NC_TRACE_SILK  [SMT-JUMPER_2_NC_TRACE_SILK]  112.01,13.08 180 bottom
PLED3  JUMPER-SMT_2_NC_TRACE_SILK  [SMT-JUMPER_2_NC_TRACE_SILK]  39.88,65.66 180 bottom
PLED4  JUMPER-SMT_2_NC_TRACE_SILK  [SMT-JUMPER_2_NC_TRACE_SILK]  75.95,65.66 180 bottom
PLED5  JUMPER-SMT_2_NC_TRACE_SILK  [SMT-JUMPER_2_NC_TRACE_SILK]  112.01,65.66 180 bottom
PLED6  JUMPER-SMT_2_NC_TRACE_SILK  [SMT-JUMPER_2_NC_TRACE_SILK]  39.88,118.24 180 bottom
PLED7  JUMPER-SMT_2_NC_TRACE_SILK  [SMT-JUMPER_2_NC_TRACE_SILK]  75.95,118.24 180 bottom
PLED8  JUMPER-SMT_2_NC_TRACE_SILK  [SMT-JUMPER_2_NC_TRACE_SILK]  112.01,118.24 180 bottom
R1  2.2k  [0603]  59.44,16.26 270 top
R2  2.2k  [0603]  37.08,16.13 0 top
R3  10k  [0603]  23.37,20.32 0 top
R4  2.2k  [0603]  61.98,16.26 270 top
R5  4.7k  [0603]  73.15,13.08 0 top
R6  2.2k  [0603]  73.15,19.18 0 top
R7  10k  [0603]  59.44,20.32 0 top
R8  2.2k  [0603]  73.15,16.13 0 top
R9  2.2k  [0603]  95.5,16.26 270 top
R10  2.2k  [0603]  98.04,16.26 270 top
R11  4.7k  [0603]  37.08,13.08 0 top
R12  2.2k  [0603]  37.08,19.18 0 top
R13  4.7k  [0603]  109.22,13.08 0 top
R14  2.2k  [0603]  23.37,16.26 270 top
R15  2.2k  [0603]  25.91,16.26 270 top
R16  2.2k  [0603]  109.22,19.18 0 top
R17  10k  [0603]  95.5,20.32 0 top
R18  2.2k  [0603]  109.22,16.13 0 top
R19  2.2k  [0603]  23.37,68.83 270 top
R20  2.2k  [0603]  25.91,68.83 270 top
R21  4.7k  [0603]  37.08,65.66 0 top
R22  2.2k  [0603]  37.08,71.76 0 top
R23  10k  [0603]  23.37,72.9 0 top
R24  2.2k  [0603]  37.08,68.71 0 top
R25  2.2k  [0603]  59.44,68.83 270 top
R26  2.2k  [0603]  61.98,68.83 270 top
R27  4.7k  [0603]  73.15,65.66 0 top
R28  2.2k  [0603]  73.15,71.76 0 top
R29  10k  [0603]  59.44,72.9 0 top
R30  2.2k  [0603]  73.15,68.71 0 top
R31  2.2k  [0603]  95.5,68.83 270 top
R32  2.2k  [0603]  98.04,68.83 270 top
R33  4.7k  [0603]  109.22,65.66 0 top
R34  2.2k  [0603]  109.22,71.76 0 top
R35  10k  [0603]  95.5,72.9 0 top
R36  2.2k  [0603]  109.22,68.71 0 top
R37  2.2k  [0603]  23.37,121.41 270 top
R38  2.2k  [0603]  25.91,121.41 270 top
R39  4.7k  [0603]  37.08,118.24 0 top
R40  2.2k  [0603]  37.08,124.33 0 top
R41  10k  [0603]  23.37,125.48 0 top
R42  2.2k  [0603]  37.08,121.29 0 top
R43  2.2k  [0603]  59.44,121.41 270 top
R44  2.2k  [0603]  61.98,121.41 270 top
R45  4.7k  [0603]  73.15,118.24 0 top
R46  2.2k  [0603]  73.15,124.33 0 top
R47  10k  [0603]  59.44,125.48 0 top
R48  2.2k  [0603]  73.15,121.29 0 top
R49  2.2k  [0603]  95.5,121.41 270 top
R50  2.2k  [0603]  98.04,121.41 270 top
R51  4.7k  [0603]  109.22,118.24 0 top
R52  2.2k  [0603]  109.22,124.33 0 top
R53  10k  [0603]  95.5,125.48 0 top
R54  2.2k  [0603]  109.22,121.29 0 top
RLED  JUMPER-SMT_2_NC_TRACE_SILK  [SMT-JUMPER_2_NC_TRACE_SILK]  39.88,16.13 180 bottom
RLED1  JUMPER-SMT_2_NC_TRACE_SILK  [SMT-JUMPER_2_NC_TRACE_SILK]  75.95,16.13 180 bottom
RLED2  JUMPER-SMT_2_NC_TRACE_SILK  [SMT-JUMPER_2_NC_TRACE_SILK]  112.01,16.13 180 bottom
RLED3  JUMPER-SMT_2_NC_TRACE_SILK  [SMT-JUMPER_2_NC_TRACE_SILK]  39.88,68.71 180 bottom
RLED4  JUMPER-SMT_2_NC_TRACE_SILK  [SMT-JUMPER_2_NC_TRACE_SILK]  75.95,68.71 180 bottom
RLED5  JUMPER-SMT_2_NC_TRACE_SILK  [SMT-JUMPER_2_NC_TRACE_SILK]  112.01,68.71 180 bottom
RLED6  JUMPER-SMT_2_NC_TRACE_SILK  [SMT-JUMPER_2_NC_TRACE_SILK]  39.88,121.29 180 bottom
RLED7  JUMPER-SMT_2_NC_TRACE_SILK  [SMT-JUMPER_2_NC_TRACE_SILK]  75.95,121.29 180 bottom
RLED8  JUMPER-SMT_2_NC_TRACE_SILK  [SMT-JUMPER_2_NC_TRACE_SILK]  112.01,121.29 180 bottom
S1  [TACTILE_SWITCH_SMD_5.2MM]  17.02,10.03 0 top
S2  [TACTILE_SWITCH_SMD_5.2MM]  32.26,10.03 0 top
S3  [TACTILE_SWITCH_SMD_5.2MM]  53.09,10.03 0 top
S4  [TACTILE_SWITCH_SMD_5.2MM]  68.33,10.03 0 top
S5  [TACTILE_SWITCH_SMD_5.2MM]  89.15,10.03 0 top
S6  [TACTILE_SWITCH_SMD_5.2MM]  104.39,10.03 0 top
S7  [TACTILE_SWITCH_SMD_5.2MM]  17.02,62.61 0 top
S8  [TACTILE_SWITCH_SMD_5.2MM]  32.26,62.61 0 top
S9  [TACTILE_SWITCH_SMD_5.2MM]  53.09,62.61 0 top
S10  [TACTILE_SWITCH_SMD_5.2MM]  68.33,62.61 0 top
S11  [TACTILE_SWITCH_SMD_5.2MM]  89.15,62.61 0 top
S12  [TACTILE_SWITCH_SMD_5.2MM]  104.39,62.61 0 top
S13  [TACTILE_SWITCH_SMD_5.2MM]  17.02,115.19 0 top
S14  [TACTILE_SWITCH_SMD_5.2MM]  32.26,115.19 0 top
S15  [TACTILE_SWITCH_SMD_5.2MM]  53.09,115.19 0 top
S16  [TACTILE_SWITCH_SMD_5.2MM]  68.33,115.19 0 top
S17  [TACTILE_SWITCH_SMD_5.2MM]  89.15,115.19 0 top
S18  [TACTILE_SWITCH_SMD_5.2MM]  104.39,115.19 0 top
U1  AP63203  [SOT23-6]  59.44,23.37 0 top
U2  AP63203  [SOT23-6]  23.37,23.37 0 top
U3  AP63203  [SOT23-6]  95.5,23.37 0 top
U4  AP63203  [SOT23-6]  23.37,75.95 0 top
U5  AP63203  [SOT23-6]  59.44,75.95 0 top
U6  AP63203  [SOT23-6]  95.5,75.95 0 top
U7  AP63203  [SOT23-6]  23.37,128.52 0 top
U8  AP63203  [SOT23-6]  59.44,128.52 0 top
U9  AP63203  [SOT23-6]  95.5,128.52 0 top
U$1  [#GND#0]  15.62,17.02 0 top
U$2  [SFE_LOGO_NAME_.2]  24.64,52.58 0 top
U$3  [#EN#17]  28.83,14.48 0 bottom
U$4  [#NC#1]  16,22.1 0 bottom
U$5  [#NC#3]  33.27,24.64 0 bottom
U$6  [#EN#17]  33.15,14.48 0 top
U$7  [#D7##CTS##26]  26.92,19.56 0 bottom
U$8  [#D0#AD0#18]  35.05,39.88 0 bottom
U$9  [#3V3#1]  20.95,39.88 0 top
U$10  [#D4#PICO#25]  26.67,17.02 0 bottom
U$11  [#RLED#22]  36.45,16.13 0 bottom
U$12  [#GND#0]  15.62,17.02 0 bottom
U$13  [#D8##DTR##27]  14.22,19.56 0 bottom
U$14  [#RSSI#D10#17]  13.84,27.18 0 bottom
U$15  [#SDA#D11#9]  13.97,24.64 0 bottom
U$16  [##RST##15]  15.62,29.59 0 bottom
U$17  [#POCI#D12#24]  13.72,32.26 0 bottom
U$18  [#RXI#D14#15]  14.22,34.8 0 bottom
U$19  [#D2#AD2#19]  35.05,34.8 0 bottom
U$20  [#D6##RTS##25]  35.05,29.59 0 bottom
U$21  [#TXO#8]  21.08,37.34 0 top
U$22  [#TXO#D13#13]  13.72,37.21 0 bottom
U$23  [EXPLORER1344]  19.56,50.04 0 bottom
U$24  [REGULATED1343]  24.64,48.26 0 bottom
U$25  [XBEE340]  28.45,50.04 0 bottom
U$26  [#I2C#33]  24.64,12.06 0 bottom
U$27  [#RXI#7]  20.7,34.8 0 top
U$28  [XBEE340]  20.83,50.04 0 top
U$29  [REGULATED1343]  24.64,48.26 0 top
U$30  [#RST#30]  12.95,10.03 90 top
U$31  [#D0#3]  28.83,39.88 0 top
U$32  [#D1#AD1#SCL#8]  36.58,37.34 0 bottom
U$33  [EXPLORER1344]  29.72,50.04 0 top
U$34  [#D3#AD3##CS##23]  36.45,32.13 0 bottom
U$35  [#D5#ASSOC#25]  36.07,27.18 0 bottom
U$36  [#D9##SLP##28]  34.92,22.1 0 bottom
U$37  [#3V3#1]  57.02,39.88 0 top
U$38  [#I2C#33]  60.71,12.06 0 bottom
U$39  [PWR26]  76.45,14.48 0 top
U$40  [D03]  35.94,10.03 90 top
U$41  [ASSOC27]  75.69,20.45 0 top
U$42  [PWR26]  40.39,14.48 0 top
U$43  [ASSOC27]  39.62,20.45 0 top
U$44  [#3V3#1]  15.62,39.88 0 bottom
U$45  [#POCI#32]  21.21,32.26 0 top
U$46  [#VIN#4]  15.88,14.35 0 bottom
U$47  [#3V3#1]  51.69,39.88 0 bottom
U$48  [#VIN#4]  51.94,14.35 0 bottom
U$49  [#ALED#21]  36.32,19.3 0 bottom
U$50  [D03]  72.01,10.03 90 top
U$51  [#RST#30]  49.02,10.03 90 top
U$52  [#PLED#20]  36.45,13.08 0 bottom
U$53  [SFE_LOGO_NAME_.2]  60.71,52.58 0 bottom
U$54  [SFE_LOGO_FLAME_.2]  46.1,51.69 0 top
U$55  [RSSI31]  76.58,17.53 0 top
U$56  [#D0#AD0#18]  71.12,39.88 0 bottom
U$57  [#D2#AD2#19]  71.12,34.8 0 bottom
U$58  [#D6##RTS##25]  71.12,29.59 0 bottom
U$59  [##CS##26]  28.96,32.13 0 top
U$60  [#SCLK#33]  27.94,34.8 0 top
U$61  [SFE_LOGO_FLAME_.2]  10.03,51.69 0 top
U$62  [RSSI31]  40.51,17.53 0 top
U$63  [SFE_LOGO_NAME_.2]  24.64,52.58 0 bottom
U$64  [#SCL#9]  28.45,37.34 0 top
U$65  [#D0#3]  28.83,39.88 0 top
U$66  [#VIN#4]  15.88,14.35 0 top
U$67  [#D5#ASSOC#25]  72.14,27.18 0 bottom
U$68  [#D9##SLP##28]  70.99,22.1 0 bottom
U$69  [#GND#0]  51.69,17.02 0 bottom
U$70  [#D8##DTR##27]  50.29,19.56 0 bottom
U$71  [#RSSI#D10#17]  49.91,27.18 0 bottom
U$72  [#SDA#D11#9]  50.04,24.64 0 bottom
U$73  [##RST##15]  51.69,29.59 0 bottom
U$74  [#POCI#D12#24]  49.78,32.26 0 bottom
U$75  [#RXI#D14#15]  50.29,34.8 0 bottom
U$76  [#TXO#D13#13]  49.78,37.21 0 bottom
U$77  [#ALED#21]  72.39,19.3 0 bottom
U$78  [#PLED#20]  72.52,13.08 0 bottom
U$79  [#TXO#8]  57.15,37.34 0 top
U$80  [#RXI#7]  56.77,34.8 0 top
U$81  [#POCI#32]  57.28,32.26 0 top
U$82  [##CS##26]  65.02,32.13 0 top
U$83  [#SCLK#33]  64.01,34.8 0 top
U$84  [#SCL#9]  64.52,37.34 0 top
U$85  [#D0#3]  64.9,39.88 0 top
U$86  [#VIN#4]  51.94,14.35 0 top
U$87  [#GND#0]  51.69,17.02 0 top
U$88  [SFE_LOGO_NAME_.2]  60.71,52.58 0 top
U$89  [#EN#17]  64.9,14.48 0 bottom
U$90  [#NC#1]  52.07,22.1 0 bottom
U$91  [#NC#3]  69.34,24.64 0 bottom
U$92  [#D7##CTS##26]  62.99,19.56 0 bottom
U$93  [#D4#PICO#25]  62.74,17.02 0 bottom
U$94  [REGULATED1343]  60.71,48.26 0 bottom
U$95  [XBEE340]  64.52,50.04 0 bottom
U$96  [XBEE340]  56.9,50.04 0 top
U$97  [REGULATED1343]  60.71,48.26 0 top
U$98  [#D0#3]  64.9,39.88 0 top
U$99  [#D1#AD1#SCL#8]  72.64,37.34 0 bottom
U$100  [#RLED#22]  72.52,16.13 0 bottom
U$101  [#D3#AD3##CS##23]  72.52,32.13 0 bottom
U$102  [#EN#17]  69.22,14.48 0 top
U$103  [EXPLORER1344]  65.79,50.04 0 top
U$104  [EXPLORER1344]  55.63,50.04 0 bottom
U$105  [#3V3#1]  93.09,39.88 0 top
U$106  [#I2C#33]  96.77,12.06 0 bottom
U$107  [PWR26]  112.52,14.48 0 top
U$108  [ASSOC27]  111.76,20.45 0 top
U$109  [#3V3#1]  87.76,39.88 0 bottom
U$110  [#VIN#4]  88.01,14.35 0 bottom
U$111  [D03]  108.08,10.03 90 top
U$112  [#RST#30]  85.09,10.03 90 top
U$113  [SFE_LOGO_NAME_.2]  96.77,52.58 0 bottom
U$114  [SFE_LOGO_FLAME_.2]  82.17,51.69 0 top
U$115  [RSSI31]  112.65,17.53 0 top
U$116  [#D0#AD0#18]  107.19,39.88 0 bottom
U$117  [#D2#AD2#19]  107.19,34.8 0 bottom
U$118  [#D6##RTS##25]  107.19,29.59 0 bottom
U$119  [#D5#ASSOC#25]  108.2,27.18 0 bottom
U$120  [#D9##SLP##28]  107.06,22.1 0 bottom
U$121  [#GND#0]  87.76,17.02 0 bottom
U$122  [#D8##DTR##27]  86.36,19.56 0 bottom
U$123  [#RSSI#D10#17]  85.98,27.18 0 bottom
U$124  [#SDA#D11#9]  86.11,24.64 0 bottom
U$125  [##RST##15]  87.76,29.59 0 bottom
U$126  [#POCI#D12#24]  85.85,32.26 0 bottom
U$127  [#RXI#D14#15]  86.36,34.8 0 bottom
U$128  [#TXO#D13#13]  85.85,37.21 0 bottom
U$129  [#ALED#21]  108.46,19.3 0 bottom
U$130  [#PLED#20]  108.59,13.08 0 bottom
U$131  [#TXO#8]  93.22,37.34 0 top
U$132  [#RXI#7]  92.84,34.8 0 top
U$133  [#POCI#32]  93.34,32.26 0 top
U$134  [##CS##26]  101.09,32.13 0 top
U$135  [#SCLK#33]  100.08,34.8 0 top
U$136  [#SCL#9]  100.58,37.34 0 top
U$137  [#D0#3]  100.97,39.88 0 top
U$138  [#VIN#4]  88.01,14.35 0 top
U$139  [#GND#0]  87.76,17.02 0 top
U$140  [SFE_LOGO_NAME_.2]  96.77,52.58 0 top
U$141  [#EN#17]  100.97,14.48 0 bottom
U$142  [#NC#1]  88.14,22.1 0 bottom
U$143  [#NC#3]  105.41,24.64 0 bottom
U$144  [#D7##CTS##26]  99.06,19.56 0 bottom
U$145  [#D4#PICO#25]  98.81,17.02 0 bottom
U$146  [REGULATED1343]  96.77,48.26 0 bottom
U$147  [XBEE340]  100.58,50.04 0 bottom
U$148  [XBEE340]  92.96,50.04 0 top
U$149  [REGULATED1343]  96.77,48.26 0 top
U$150  [#D0#3]  100.97,39.88 0 top
U$151  [#D1#AD1#SCL#8]  108.71,37.34 0 bottom
U$152  [#RLED#22]  108.59,16.13 0 bottom
U$153  [#D3#AD3##CS##23]  108.59,32.13 0 bottom
U$154  [#EN#17]  105.28,14.48 0 top
U$155  [EXPLORER1344]  101.85,50.04 0 top
U$156  [EXPLORER1344]  91.69,50.04 0 bottom
U$157  [#3V3#1]  20.95,92.46 0 top
U$158  [#I2C#33]  24.64,64.64 0 bottom
U$159  [PWR26]  40.39,67.06 0 top
U$160  [ASSOC27]  39.62,73.03 0 top
U$161  [#3V3#1]  15.62,92.46 0 bottom
U$162  [#VIN#4]  15.88,66.93 0 bottom
U$163  [D03]  35.94,62.61 90 top
U$164  [#RST#30]  12.95,62.61 90 top
U$165  [SFE_LOGO_NAME_.2]  24.64,105.16 0 bottom
U$166  [SFE_LOGO_FLAME_.2]  10.03,104.27 0 top
U$167  [RSSI31]  40.51,70.1 0 top
U$168  [#D0#AD0#18]  35.05,92.46 0 bottom
U$169  [#D2#AD2#19]  35.05,87.38 0 bottom
U$170  [#D6##RTS##25]  35.05,82.17 0 bottom
U$171  [#D5#ASSOC#25]  36.07,79.76 0 bottom
U$172  [#D9##SLP##28]  34.92,74.68 0 bottom
U$173  [#GND#0]  15.62,69.6 0 bottom
U$174  [#D8##DTR##27]  14.22,72.14 0 bottom
U$175  [#RSSI#D10#17]  13.84,79.76 0 bottom
U$176  [#SDA#D11#9]  13.97,77.22 0 bottom
U$177  [##RST##15]  15.62,82.17 0 bottom
U$178  [#POCI#D12#24]  13.72,84.84 0 bottom
U$179  [#RXI#D14#15]  14.22,87.38 0 bottom
U$180  [#TXO#D13#13]  13.72,89.79 0 bottom
U$181  [#ALED#21]  36.32,71.88 0 bottom
U$182  [#PLED#20]  36.45,65.66 0 bottom
U$183  [#TXO#8]  21.08,89.92 0 top
U$184  [#RXI#7]  20.7,87.38 0 top
U$185  [#POCI#32]  21.21,84.84 0 top
U$186  [##CS##26]  28.96,84.71 0 top
U$187  [#SCLK#33]  27.94,87.38 0 top
U$188  [#SCL#9]  28.45,89.92 0 top
U$189  [#D0#3]  28.83,92.46 0 top
U$190  [#VIN#4]  15.88,66.93 0 top
U$191  [#GND#0]  15.62,69.6 0 top
U$192  [SFE_LOGO_NAME_.2]  24.64,105.16 0 top
U$193  [#EN#17]  28.83,67.06 0 bottom
U$194  [#NC#1]  16,74.68 0 bottom
U$195  [#NC#3]  33.27,77.22 0 bottom
U$196  [#D7##CTS##26]  26.92,72.14 0 bottom
U$197  [#D4#PICO#25]  26.67,69.6 0 bottom
U$198  [REGULATED1343]  24.64,100.84 0 bottom
U$199  [XBEE340]  28.45,102.62 0 bottom
U$200  [XBEE340]  20.83,102.62 0 top
U$201  [REGULATED1343]  24.64,100.84 0 top
U$202  [#D0#3]  28.83,92.46 0 top
U$203  [#D1#AD1#SCL#8]  36.58,89.92 0 bottom
U$204  [#RLED#22]  36.45,68.71 0 bottom
U$205  [#D3#AD3##CS##23]  36.45,84.71 0 bottom
U$206  [#EN#17]  33.15,67.06 0 top
U$207  [EXPLORER1344]  29.72,102.62 0 top
U$208  [EXPLORER1344]  19.56,102.62 0 bottom
U$209  [#3V3#1]  57.02,92.46 0 top
U$210  [#I2C#33]  60.71,64.64 0 bottom
U$211  [PWR26]  76.45,67.06 0 top
U$212  [ASSOC27]  75.69,73.03 0 top
U$213  [#3V3#1]  51.69,92.46 0 bottom
U$214  [#VIN#4]  51.94,66.93 0 bottom
U$215  [D03]  72.01,62.61 90 top
U$216  [#RST#30]  49.02,62.61 90 top
U$217  [SFE_LOGO_NAME_.2]  60.71,105.16 0 bottom
U$218  [SFE_LOGO_FLAME_.2]  46.1,104.27 0 top
U$219  [RSSI31]  76.58,70.1 0 top
U$220  [#D0#AD0#18]  71.12,92.46 0 bottom
U$221  [#D2#AD2#19]  71.12,87.38 0 bottom
U$222  [#D6##RTS##25]  71.12,82.17 0 bottom
U$223  [#D5#ASSOC#25]  72.14,79.76 0 bottom
U$224  [#D9##SLP##28]  70.99,74.68 0 bottom
U$225  [#GND#0]  51.69,69.6 0 bottom
U$226  [#D8##DTR##27]  50.29,72.14 0 bottom
U$227  [#RSSI#D10#17]  49.91,79.76 0 bottom
U$228  [#SDA#D11#9]  50.04,77.22 0 bottom
U$229  [##RST##15]  51.69,82.17 0 bottom
U$230  [#POCI#D12#24]  49.78,84.84 0 bottom
U$231  [#RXI#D14#15]  50.29,87.38 0 bottom
U$232  [#TXO#D13#13]  49.78,89.79 0 bottom
U$233  [#ALED#21]  72.39,71.88 0 bottom
U$234  [#PLED#20]  72.52,65.66 0 bottom
U$235  [#TXO#8]  57.15,89.92 0 top
U$236  [#RXI#7]  56.77,87.38 0 top
U$237  [#POCI#32]  57.28,84.84 0 top
U$238  [##CS##26]  65.02,84.71 0 top
U$239  [#SCLK#33]  64.01,87.38 0 top
U$240  [#SCL#9]  64.52,89.92 0 top
U$241  [#D0#3]  64.9,92.46 0 top
U$242  [#VIN#4]  51.94,66.93 0 top
U$243  [#GND#0]  51.69,69.6 0 top
U$244  [SFE_LOGO_NAME_.2]  60.71,105.16 0 top
U$245  [#EN#17]  64.9,67.06 0 bottom
U$246  [#NC#1]  52.07,74.68 0 bottom
U$247  [#NC#3]  69.34,77.22 0 bottom
U$248  [#D7##CTS##26]  62.99,72.14 0 bottom
U$249  [#D4#PICO#25]  62.74,69.6 0 bottom
U$250  [REGULATED1343]  60.71,100.84 0 bottom
U$251  [XBEE340]  64.52,102.62 0 bottom
U$252  [XBEE340]  56.9,102.62 0 top
U$253  [REGULATED1343]  60.71,100.84 0 top
U$254  [#D0#3]  64.9,92.46 0 top
U$255  [#D1#AD1#SCL#8]  72.64,89.92 0 bottom
U$256  [#RLED#22]  72.52,68.71 0 bottom
U$257  [#D3#AD3##CS##23]  72.52,84.71 0 bottom
U$258  [#EN#17]  69.22,67.06 0 top
U$259  [EXPLORER1344]  65.79,102.62 0 top
U$260  [EXPLORER1344]  55.63,102.62 0 bottom
U$261  [#3V3#1]  93.09,92.46 0 top
U$262  [#I2C#33]  96.77,64.64 0 bottom
U$263  [PWR26]  112.52,67.06 0 top
U$264  [ASSOC27]  111.76,73.03 0 top
U$265  [#3V3#1]  87.76,92.46 0 bottom
U$266  [#VIN#4]  88.01,66.93 0 bottom
U$267  [D03]  108.08,62.61 90 top
U$268  [#RST#30]  85.09,62.61 90 top
U$269  [SFE_LOGO_NAME_.2]  96.77,105.16 0 bottom
U$270  [SFE_LOGO_FLAME_.2]  82.17,104.27 0 top
U$271  [RSSI31]  112.65,70.1 0 top
U$272  [#D0#AD0#18]  107.19,92.46 0 bottom
U$273  [#D2#AD2#19]  107.19,87.38 0 bottom
U$274  [#D6##RTS##25]  107.19,82.17 0 bottom
U$275  [#D5#ASSOC#25]  108.2,79.76 0 bottom
U$276  [#D9##SLP##28]  107.06,74.68 0 bottom
U$277  [#GND#0]  87.76,69.6 0 bottom
U$278  [#D8##DTR##27]  86.36,72.14 0 bottom
U$279  [#RSSI#D10#17]  85.98,79.76 0 bottom
U$280  [#SDA#D11#9]  86.11,77.22 0 bottom
U$281  [##RST##15]  87.76,82.17 0 bottom
U$282  [#POCI#D12#24]  85.85,84.84 0 bottom
U$283  [#RXI#D14#15]  86.36,87.38 0 bottom
U$284  [#TXO#D13#13]  85.85,89.79 0 bottom
U$285  [#ALED#21]  108.46,71.88 0 bottom
U$286  [#PLED#20]  108.59,65.66 0 bottom
U$287  [#TXO#8]  93.22,89.92 0 top
U$288  [#RXI#7]  92.84,87.38 0 top
U$289  [#POCI#32]  93.34,84.84 0 top
U$290  [##CS##26]  101.09,84.71 0 top
U$291  [#SCLK#33]  100.08,87.38 0 top
U$292  [#SCL#9]  100.58,89.92 0 top
U$293  [#D0#3]  100.97,92.46 0 top
U$294  [#VIN#4]  88.01,66.93 0 top
U$295  [#GND#0]  87.76,69.6 0 top
U$296  [SFE_LOGO_NAME_.2]  96.77,105.16 0 top
U$297  [#EN#17]  100.97,67.06 0 bottom
U$298  [#NC#1]  88.14,74.68 0 bottom
U$299  [#NC#3]  105.41,77.22 0 bottom
U$300  [#D7##CTS##26]  99.06,72.14 0 bottom
U$301  [#D4#PICO#25]  98.81,69.6 0 bottom
U$302  [REGULATED1343]  96.77,100.84 0 bottom
U$303  [XBEE340]  100.58,102.62 0 bottom
U$304  [XBEE340]  92.96,102.62 0 top
U$305  [REGULATED1343]  96.77,100.84 0 top
U$306  [#D0#3]  100.97,92.46 0 top
U$307  [#D1#AD1#SCL#8]  108.71,89.92 0 bottom
U$308  [#RLED#22]  108.59,68.71 0 bottom
U$309  [#D3#AD3##CS##23]  108.59,84.71 0 bottom
U$310  [#EN#17]  105.28,67.06 0 top
U$311  [EXPLORER1344]  101.85,102.62 0 top
U$312  [EXPLORER1344]  91.69,102.62 0 bottom
U$313  [#3V3#1]  20.95,145.03 0 top
U$314  [#I2C#33]  24.64,117.22 0 bottom
U$315  [PWR26]  40.39,119.63 0 top
U$316  [ASSOC27]  39.62,125.6 0 top
U$317  [#3V3#1]  15.62,145.03 0 bottom
U$318  [#VIN#4]  15.88,119.51 0 bottom
U$319  [D03]  35.94,115.19 90 top
U$320  [#RST#30]  12.95,115.19 90 top
U$321  [SFE_LOGO_NAME_.2]  24.64,157.73 0 bottom
U$322  [SFE_LOGO_FLAME_.2]  10.03,156.84 0 top
U$323  [RSSI31]  40.51,122.68 0 top
U$324  [#D0#AD0#18]  35.05,145.03 0 bottom
U$325  [#D2#AD2#19]  35.05,139.95 0 bottom
U$326  [#D6##RTS##25]  35.05,134.75 0 bottom
U$327  [#D5#ASSOC#25]  36.07,132.33 0 bottom
U$328  [#D9##SLP##28]  34.92,127.25 0 bottom
U$329  [#GND#0]  15.62,122.17 0 bottom
U$330  [#D8##DTR##27]  14.22,124.71 0 bottom
U$331  [#RSSI#D10#17]  13.84,132.33 0 bottom
U$332  [#SDA#D11#9]  13.97,129.79 0 bottom
U$333  [##RST##15]  15.62,134.75 0 bottom
U$334  [#POCI#D12#24]  13.72,137.41 0 bottom
U$335  [#RXI#D14#15]  14.22,139.95 0 bottom
U$336  [#TXO#D13#13]  13.72,142.37 0 bottom
U$337  [#ALED#21]  36.32,124.46 0 bottom
U$338  [#PLED#20]  36.45,118.24 0 bottom
U$339  [#TXO#8]  21.08,142.49 0 top
U$340  [#RXI#7]  20.7,139.95 0 top
U$341  [#POCI#32]  21.21,137.41 0 top
U$342  [##CS##26]  28.96,137.29 0 top
U$343  [#SCLK#33]  27.94,139.95 0 top
U$344  [#SCL#9]  28.45,142.49 0 top
U$345  [#D0#3]  28.83,145.03 0 top
U$346  [#VIN#4]  15.88,119.51 0 top
U$347  [#GND#0]  15.62,122.17 0 top
U$348  [SFE_LOGO_NAME_.2]  24.64,157.73 0 top
U$349  [#EN#17]  28.83,119.63 0 bottom
U$350  [#NC#1]  16,127.25 0 bottom
U$351  [#NC#3]  33.27,129.79 0 bottom
U$352  [#D7##CTS##26]  26.92,124.71 0 bottom
U$353  [#D4#PICO#25]  26.67,122.17 0 bottom
U$354  [REGULATED1343]  24.64,153.42 0 bottom
U$355  [XBEE340]  28.45,155.19 0 bottom
U$356  [XBEE340]  20.83,155.19 0 top
U$357  [REGULATED1343]  24.64,153.42 0 top
U$358  [#D0#3]  28.83,145.03 0 top
U$359  [#D1#AD1#SCL#8]  36.58,142.49 0 bottom
U$360  [#RLED#22]  36.45,121.29 0 bottom
U$361  [#D3#AD3##CS##23]  36.45,137.29 0 bottom
U$362  [#EN#17]  33.15,119.63 0 top
U$363  [EXPLORER1344]  29.72,155.19 0 top
U$364  [EXPLORER1344]  19.56,155.19 0 bottom
U$365  [#3V3#1]  57.02,145.03 0 top
U$366  [#I2C#33]  60.71,117.22 0 bottom
U$367  [PWR26]  76.45,119.63 0 top
U$368  [ASSOC27]  75.69,125.6 0 top
U$369  [#3V3#1]  51.69,145.03 0 bottom
U$370  [#VIN#4]  51.94,119.51 0 bottom
U$371  [D03]  72.01,115.19 90 top
U$372  [#RST#30]  49.02,115.19 90 top
U$373  [SFE_LOGO_NAME_.2]  60.71,157.73 0 bottom
U$374  [SFE_LOGO_FLAME_.2]  46.1,156.84 0 top
U$375  [RSSI31]  76.58,122.68 0 top
U$376  [#D0#AD0#18]  71.12,145.03 0 bottom
U$377  [#D2#AD2#19]  71.12,139.95 0 bottom
U$378  [#D6##RTS##25]  71.12,134.75 0 bottom
U$379  [#D5#ASSOC#25]  72.14,132.33 0 bottom
U$380  [#D9##SLP##28]  70.99,127.25 0 bottom
U$381  [#GND#0]  51.69,122.17 0 bottom
U$382  [#D8##DTR##27]  50.29,124.71 0 bottom
U$383  [#RSSI#D10#17]  49.91,132.33 0 bottom
U$384  [#SDA#D11#9]  50.04,129.79 0 bottom
U$385  [##RST##15]  51.69,134.75 0 bottom
U$386  [#POCI#D12#24]  49.78,137.41 0 bottom
U$387  [#RXI#D14#15]  50.29,139.95 0 bottom
U$388  [#TXO#D13#13]  49.78,142.37 0 bottom
U$389  [#ALED#21]  72.39,124.46 0 bottom
U$390  [#PLED#20]  72.52,118.24 0 bottom
U$391  [#TXO#8]  57.15,142.49 0 top
U$392  [#RXI#7]  56.77,139.95 0 top
U$393  [#POCI#32]  57.28,137.41 0 top
U$394  [##CS##26]  65.02,137.29 0 top
U$395  [#SCLK#33]  64.01,139.95 0 top
U$396  [#SCL#9]  64.52,142.49 0 top
U$397  [#D0#3]  64.9,145.03 0 top
U$398  [#VIN#4]  51.94,119.51 0 top
U$399  [#GND#0]  51.69,122.17 0 top
U$400  [SFE_LOGO_NAME_.2]  60.71,157.73 0 top
U$401  [#EN#17]  64.9,119.63 0 bottom
U$402  [#NC#1]  52.07,127.25 0 bottom
U$403  [#NC#3]  69.34,129.79 0 bottom
U$404  [#D7##CTS##26]  62.99,124.71 0 bottom
U$405  [#D4#PICO#25]  62.74,122.17 0 bottom
U$406  [REGULATED1343]  60.71,153.42 0 bottom
U$407  [XBEE340]  64.52,155.19 0 bottom
U$408  [XBEE340]  56.9,155.19 0 top
U$409  [REGULATED1343]  60.71,153.42 0 top
U$410  [#D0#3]  64.9,145.03 0 top
U$411  [#D1#AD1#SCL#8]  72.64,142.49 0 bottom
U$412  [#RLED#22]  72.52,121.29 0 bottom
U$413  [#D3#AD3##CS##23]  72.52,137.29 0 bottom
U$414  [#EN#17]  69.22,119.63 0 top
U$415  [EXPLORER1344]  65.79,155.19 0 top
U$416  [EXPLORER1344]  55.63,155.19 0 bottom
U$417  [#3V3#1]  93.09,145.03 0 top
U$418  [#I2C#33]  96.77,117.22 0 bottom
U$419  [PWR26]  112.52,119.63 0 top
U$420  [ASSOC27]  111.76,125.6 0 top
U$421  [#3V3#1]  87.76,145.03 0 bottom
U$422  [#VIN#4]  88.01,119.51 0 bottom
U$423  [D03]  108.08,115.19 90 top
U$424  [#RST#30]  85.09,115.19 90 top
U$425  [SFE_LOGO_NAME_.2]  96.77,157.73 0 bottom
U$426  [SFE_LOGO_FLAME_.2]  82.17,156.84 0 top
U$427  [RSSI31]  112.65,122.68 0 top
U$428  [#D0#AD0#18]  107.19,145.03 0 bottom
U$429  [#D2#AD2#19]  107.19,139.95 0 bottom
U$430  [#D6##RTS##25]  107.19,134.75 0 bottom
U$431  [#D5#ASSOC#25]  108.2,132.33 0 bottom
U$432  [#D9##SLP##28]  107.06,127.25 0 bottom
U$433  [#GND#0]  87.76,122.17 0 bottom
U$434  [#D8##DTR##27]  86.36,124.71 0 bottom
U$435  [#RSSI#D10#17]  85.98,132.33 0 bottom
U$436  [#SDA#D11#9]  86.11,129.79 0 bottom
U$437  [##RST##15]  87.76,134.75 0 bottom
U$438  [#POCI#D12#24]  85.85,137.41 0 bottom
U$439  [#RXI#D14#15]  86.36,139.95 0 bottom
U$440  [#TXO#D13#13]  85.85,142.37 0 bottom
U$441  [#ALED#21]  108.46,124.46 0 bottom
U$442  [#PLED#20]  108.59,118.24 0 bottom
U$443  [#TXO#8]  93.22,142.49 0 top
U$444  [#RXI#7]  92.84,139.95 0 top
U$445  [#POCI#32]  93.34,137.41 0 top
U$446  [##CS##26]  101.09,137.29 0 top
U$447  [#SCLK#33]  100.08,139.95 0 top
U$448  [#SCL#9]  100.58,142.49 0 top
U$449  [#D0#3]  100.97,145.03 0 top
U$450  [#VIN#4]  88.01,119.51 0 top
U$451  [#GND#0]  87.76,122.17 0 top
U$452  [SFE_LOGO_NAME_.2]  96.77,157.73 0 top
U$453  [#EN#17]  100.97,119.63 0 bottom
U$454  [#NC#1]  88.14,127.25 0 bottom
U$455  [#NC#3]  105.41,129.79 0 bottom
U$456  [#D7##CTS##26]  99.06,124.71 0 bottom
U$457  [#D4#PICO#25]  98.81,122.17 0 bottom
U$458  [REGULATED1343]  96.77,153.42 0 bottom
U$459  [XBEE340]  100.58,155.19 0 bottom
U$460  [XBEE340]  92.96,155.19 0 top
U$461  [REGULATED1343]  96.77,153.42 0 top
U$462  [#D0#3]  100.97,145.03 0 top
U$463  [#D1#AD1#SCL#8]  108.71,142.49 0 bottom
U$464  [#RLED#22]  108.59,121.29 0 bottom
U$465  [#D3#AD3##CS##23]  108.59,137.29 0 bottom
U$466  [#EN#17]  105.28,119.63 0 top
U$467  [EXPLORER1344]  101.85,155.19 0 top
U$468  [EXPLORER1344]  91.69,155.19 0 bottom

## Library data of the parts
ALED ALED1-ALED8 I2C_PU I2C_PU1-I2C_PU8 PLED PLED1-PLED8 RLED RLED1-RLED8 = SparkFun-Jumpers
C1 C14 C24 C34 C44 C54 C64 C74 C84 = SparkFun-Capacitors; PROD_ID: CAP-09824
C2 C4 C12 C13 C22 C23 C32 C33 C42 C43 C52 C53 C62 C63 C72 C73 C82 C83 = SparkFun-Capacitors; PROD_ID: CAP-14464
C3 C11 C21 C31 C41 C51 C61 C71 C81 = SparkFun-Capacitors; PROD_ID: CAP-08604
C5 C19 C29 C39 C49 C59 C69 C79 C89 = SparkFun-Capacitors; PROD_ID: CAP-08913
C6 C7 C15 C16 C25 C26 C35 C36 C45 C46 C55 C56 C65 C66 C75 C76 C85 C86 = SparkFun-Capacitors; PROD_ID: CAP-00867
C8 C20 C30 C40 C50 C60 C70 C80 C90 = SparkFun-Capacitors; PROD_ID: CAP-11812
C9 C17 C27 C37 C47 C57 C67 C77 C87 = SparkFun-Capacitors; PROD_ID: CAP-00810
C10 C18 C28 C38 C48 C58 C68 C78 C88 = SparkFun-Capacitors; PROD_ID: CAP-11015
D1 D2 D7 D10 D13 D16 D19 D22 D25 = SparkFun-LED; PROD_ID: DIO-17976
D3 D5 D8 D11 D14 D17 D20 D23 D26 = SparkFun-LED; PROD_ID: DIO-08575
D4 D6 D9 D12 D15 D18 D21 D24 D27 = SparkFun-LED; PROD_ID: DIO-09003
E$1-E$4 FD1-FD36 FRAME1-FRAME9 LOGO1-LOGO27 U$2 U$53 U$54 U$61 U$63 U$88 U$113 U$114 U$140 U$165 U$166 U$192 U$217 U$218 U$244 U$269 U$270 U$296 U$321 U$322 U$348 U$373 U$374 U$400 U$425 U$426 U$452 = SparkFun-Aesthetics
E$5 E$6 = SparkFun-Retired
H1-H36 = SparkFun-Hardware
J1 J3 J5 J6 J8 J9 J11 J12 J14 J15 J17 J18 J20 J21 J23 J24 J26 J27 J29 J30 J32 J33 J35 J36 J38 J39 J41 J42 J44 J45 J47 J48 J50 J51 J53 J54 = SparkFun-Connectors
J2 J10 J16 J22 J28 J34 J40 J46 J52 = xbee_smart_modem
J4 J7 J13 J19 J25 J31 J37 J43 J49 = SparkFun-Connectors; PROD_ID: CONN-13694
L1-L9 = SparkFun-Coils; PROD_ID: NDUC-18014
R1 R2 R4 R6 R8-R10 R12 R14-R16 R18-R20 R22 R24-R26 R28 R30-R32 R34 R36-R38 R40 R42-R44 R46 R48-R50 R52 R54 = SparkFun-Resistors; PROD_ID: RES-08272
R3 R7 R17 R23 R29 R35 R41 R47 R53 = SparkFun-Resistors; PROD_ID: RES-00824
R5 R11 R13 R21 R27 R33 R39 R45 R51 = SparkFun-Resistors; PROD_ID: RES-07857
S1-S18 = SparkFun-Switches; PROD_ID: SWCH-14139
U1-U9 = SparkFun-IC-Power; PROD_ID: VREG-15244
U$1 U$3 U$4 U$6 U$8 U$11-U$20 U$22-U$24 U$29 U$32-U$36 U$49 U$52 U$56-U$58 U$67-U$78 U$87 U$89 U$90 U$94 U$97 U$99-U$104 U$116-U$130 U$139 U$141 U$142 U$146 U$149 U$151-U$156 U$168-U$182 U$191 U$193 U$194 U$198 U$201 U$203-U$208 U$220-U$234 U$243 U$245 U$246 U$250 U$253 U$255-U$260 U$272-U$286 U$295 U$297 U$298 U$302 U$305 U$307-U$312 U$324-U$338 U$347 U$349 U$350 U$354 U$357 U$359-U$364 U$376-U$390 U$399 U$401 U$402 U$406 U$409 U$411-U$416 U$428-U$442 U$451 U$453 U$454 U$458 U$461 U$463-U$468 = topmirror
U$5 U$21 U$27 U$31 U$45 U$59 U$60 U$64 U$65 U$79-U$85 U$91 U$98 U$131-U$137 U$143 U$150 U$183-U$189 U$195 U$202 U$235-U$241 U$247 U$254 U$287-U$293 U$299 U$306 U$339-U$345 U$351 U$358 U$391-U$397 U$403 U$410 U$443-U$449 U$455 U$462 = botmirror
U$7 U$9 U$10 U$25 U$26 U$28 U$30 U$37-U$39 U$41-U$44 U$46-U$48 U$51 U$55 U$62 U$66 U$86 U$92 U$93 U$95 U$96 U$105-U$110 U$112 U$115 U$138 U$144 U$145 U$147 U$148 U$157-U$162 U$164 U$167 U$190 U$196 U$197 U$199 U$200 U$209-U$214 U$216 U$219 U$242 U$248 U$249 U$251 U$252 U$261-U$266 U$268 U$271 U$294 U$300 U$301 U$303 U$304 U$313-U$318 U$320 U$323 U$346 U$352 U$353 U$355 U$356 U$365-U$370 U$372 U$375 U$398 U$404 U$405 U$407 U$408 U$417-U$422 U$424 U$427 U$450 U$456 U$457 U$459 U$460 = top
U$40 U$50 U$111 U$163 U$215 U$267 U$319 U$371 U$423 = bot